# Altium PCB LNA.PcbDoc (part 1 of 2)
Units mm, origin at the board's own origin, x right, y up, seen from the top; angles counter-clockwise.
Board outline 50 x 50 mm, 4 copper layers (Top Layer, Layer 2, Layer 3, Bottom Layer), stack 1.513 mm thick; 84 components, 40 nets, 185 pads, 185 vias.
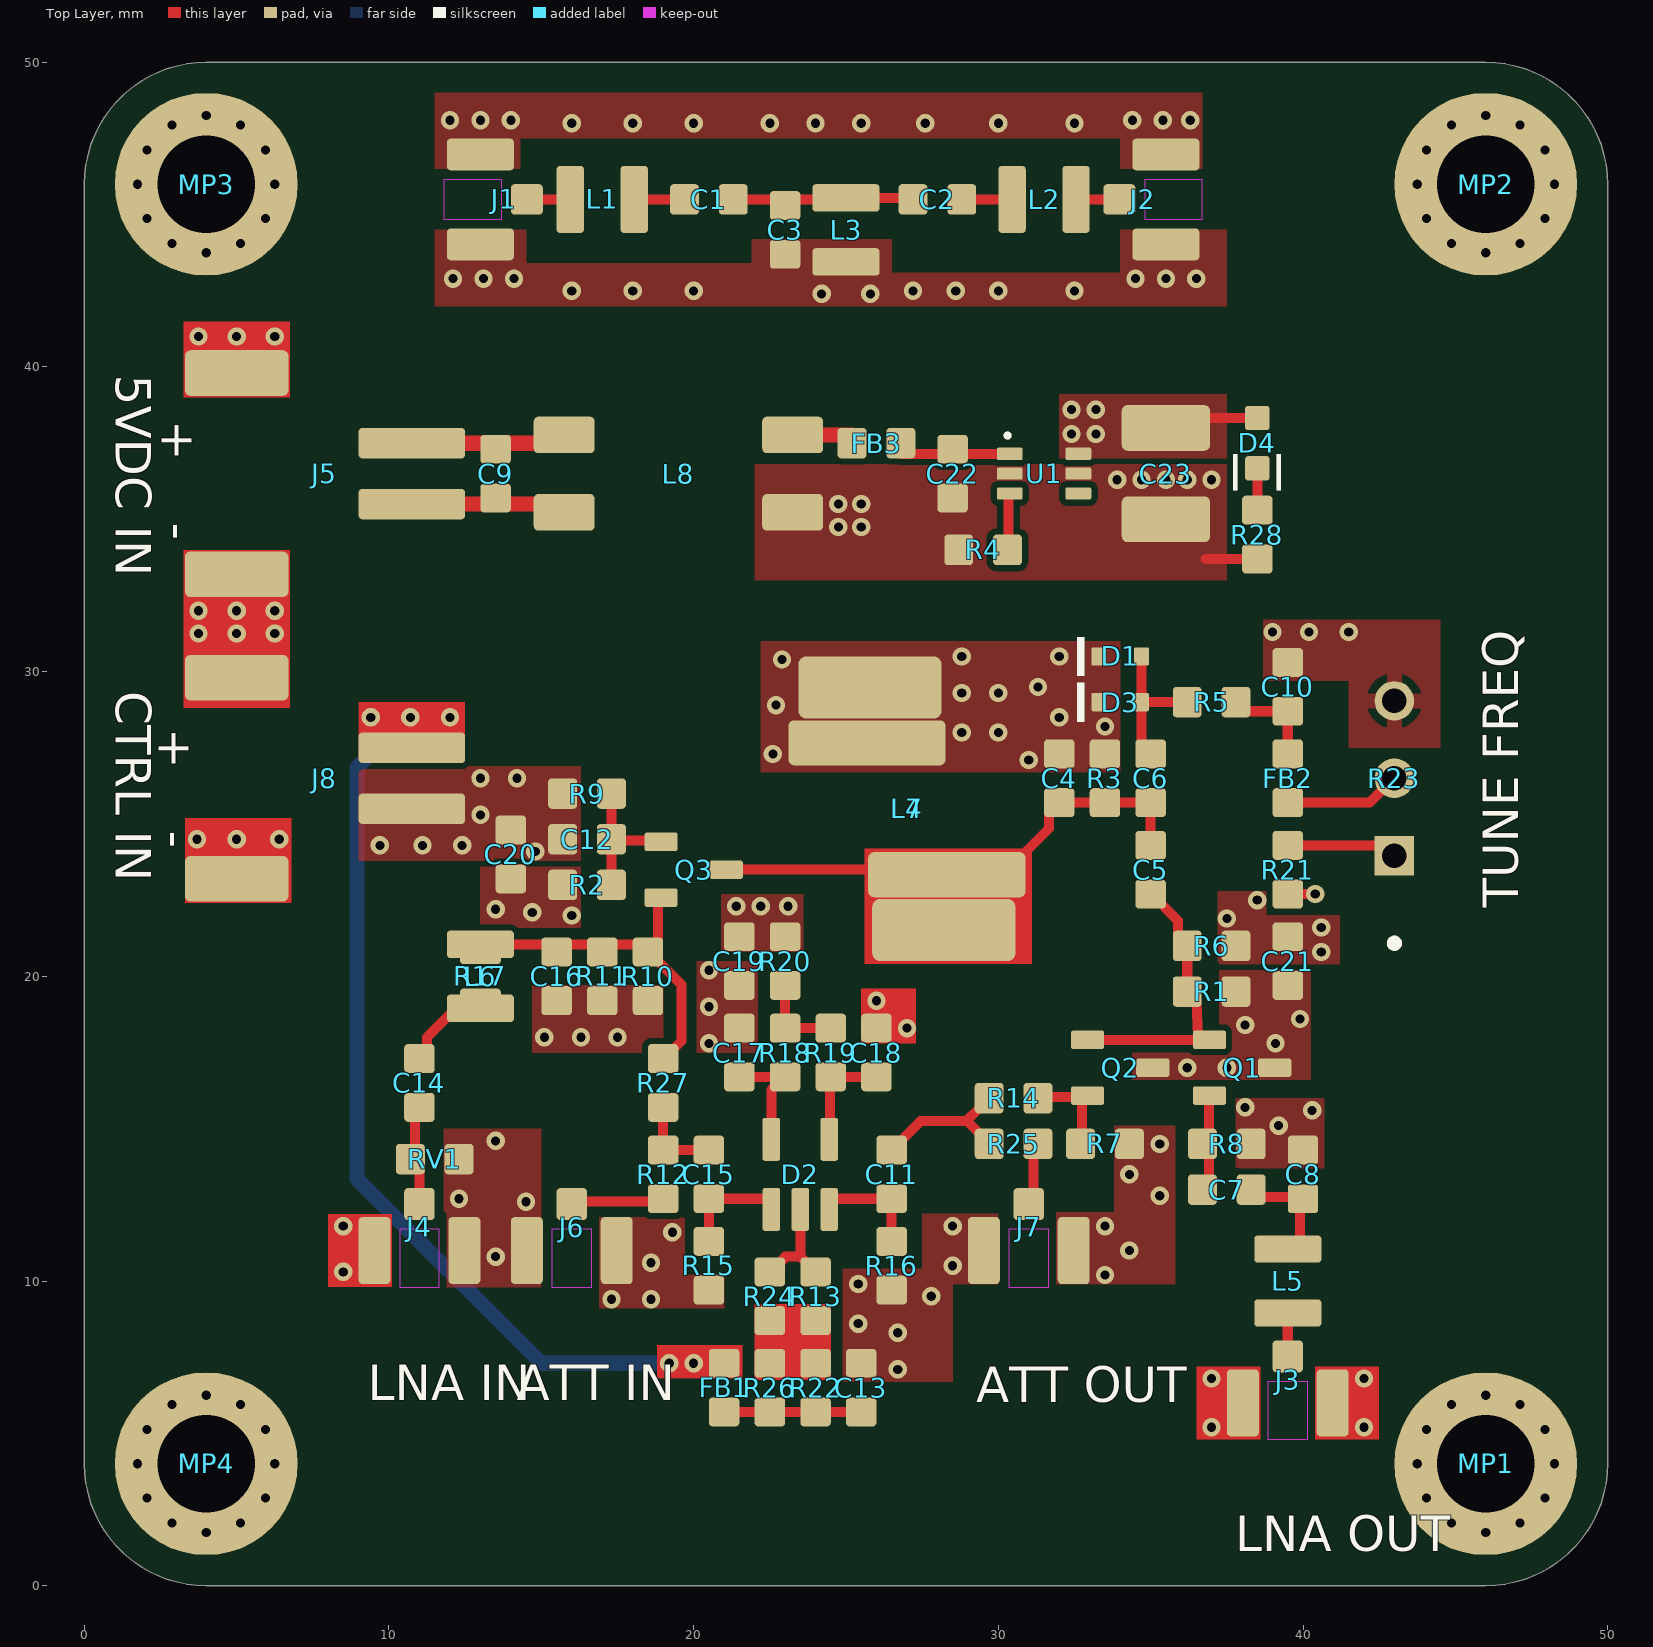
[diagram p0: Top Layer view]
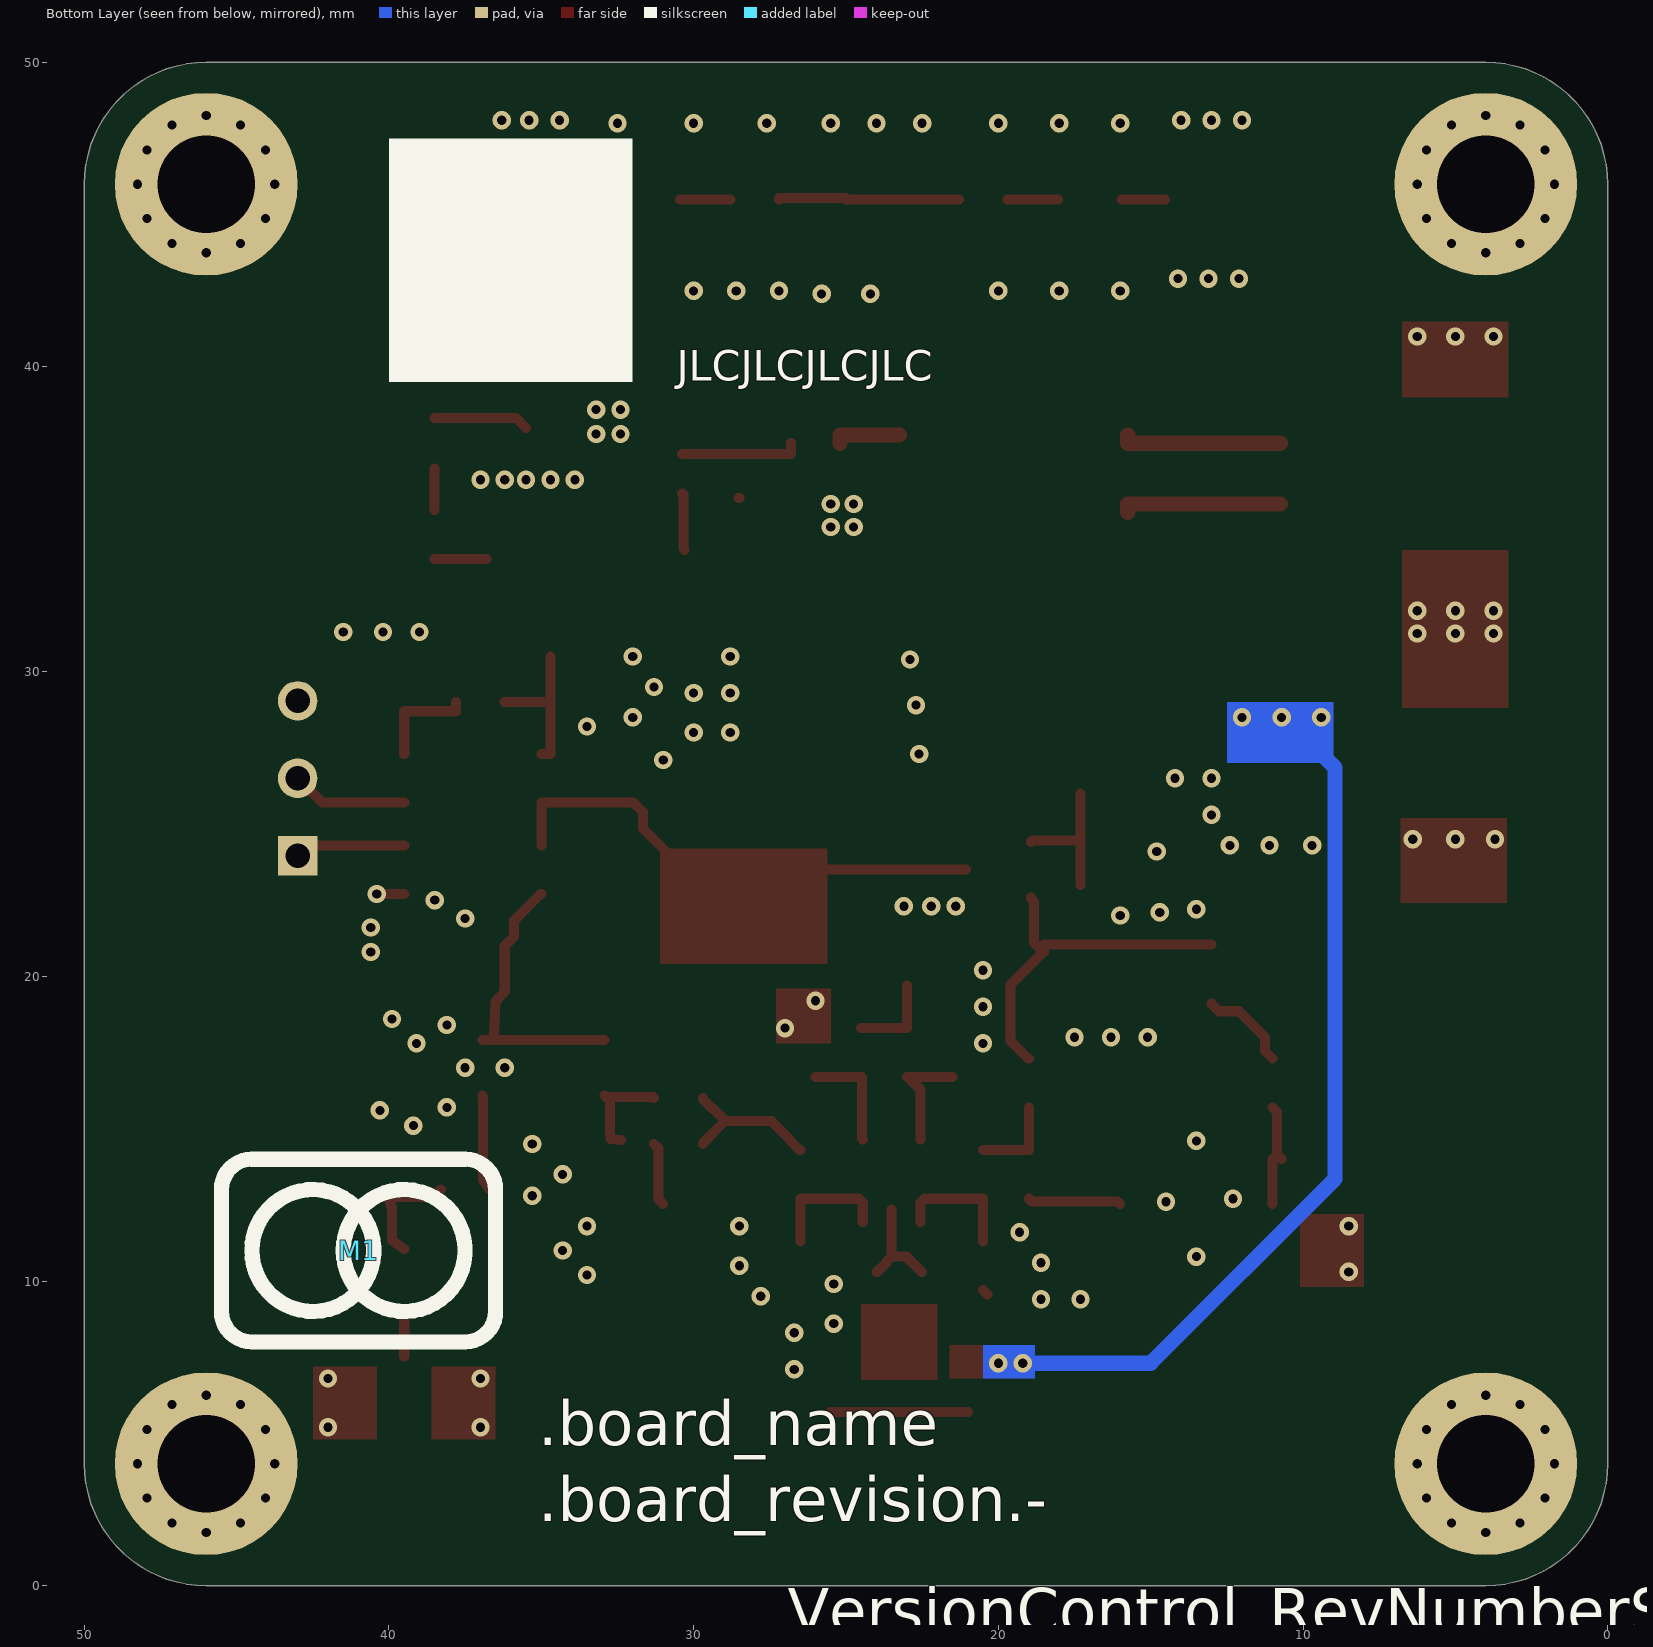
[diagram p1: Bottom Layer view, seen from below]
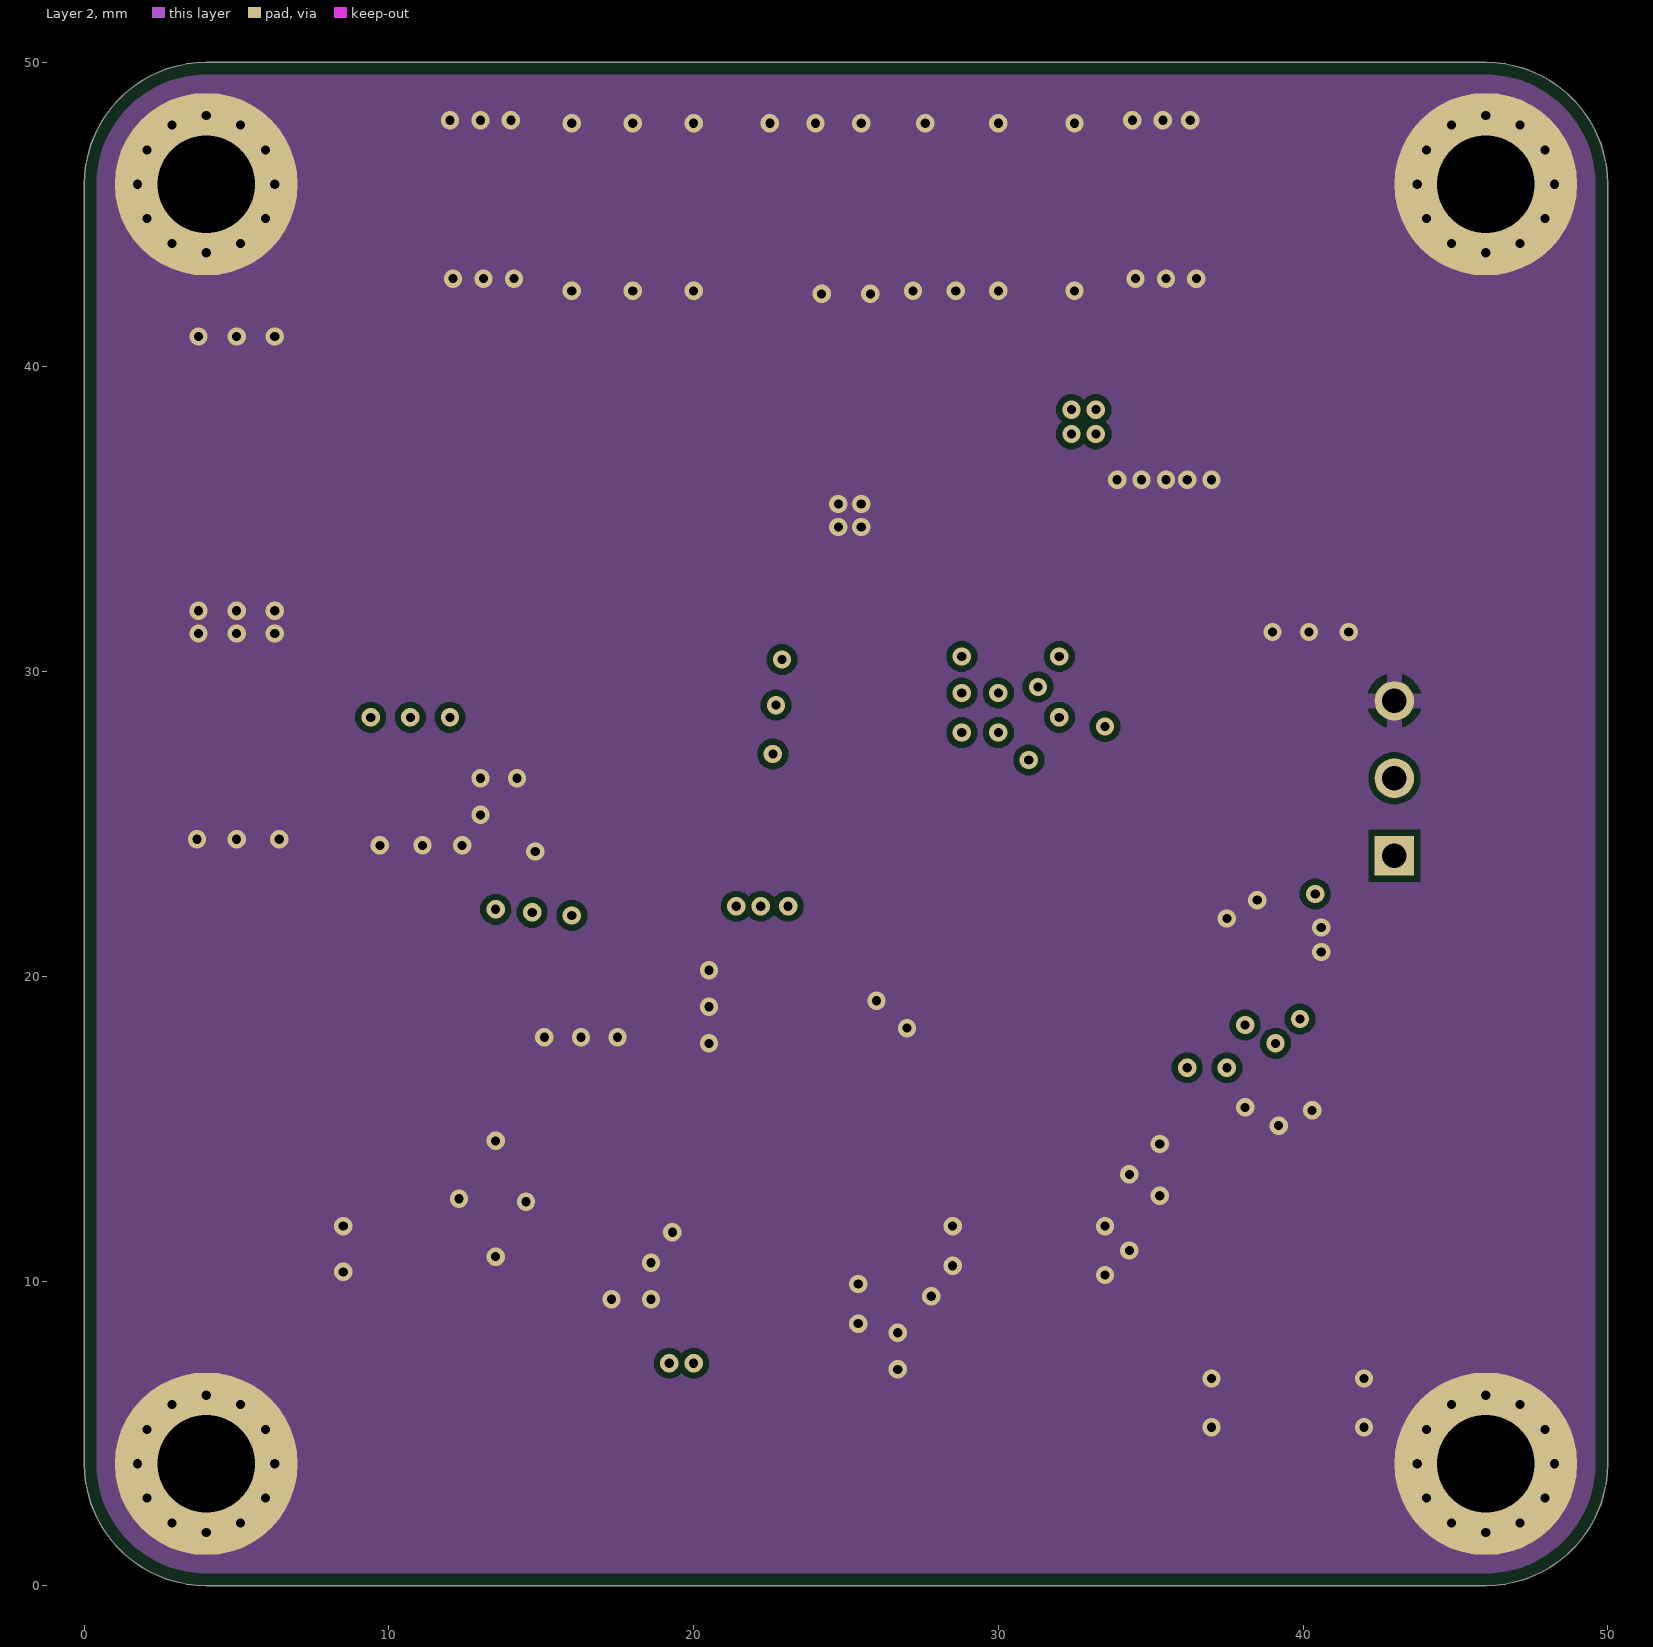
[diagram p2: Layer 2]
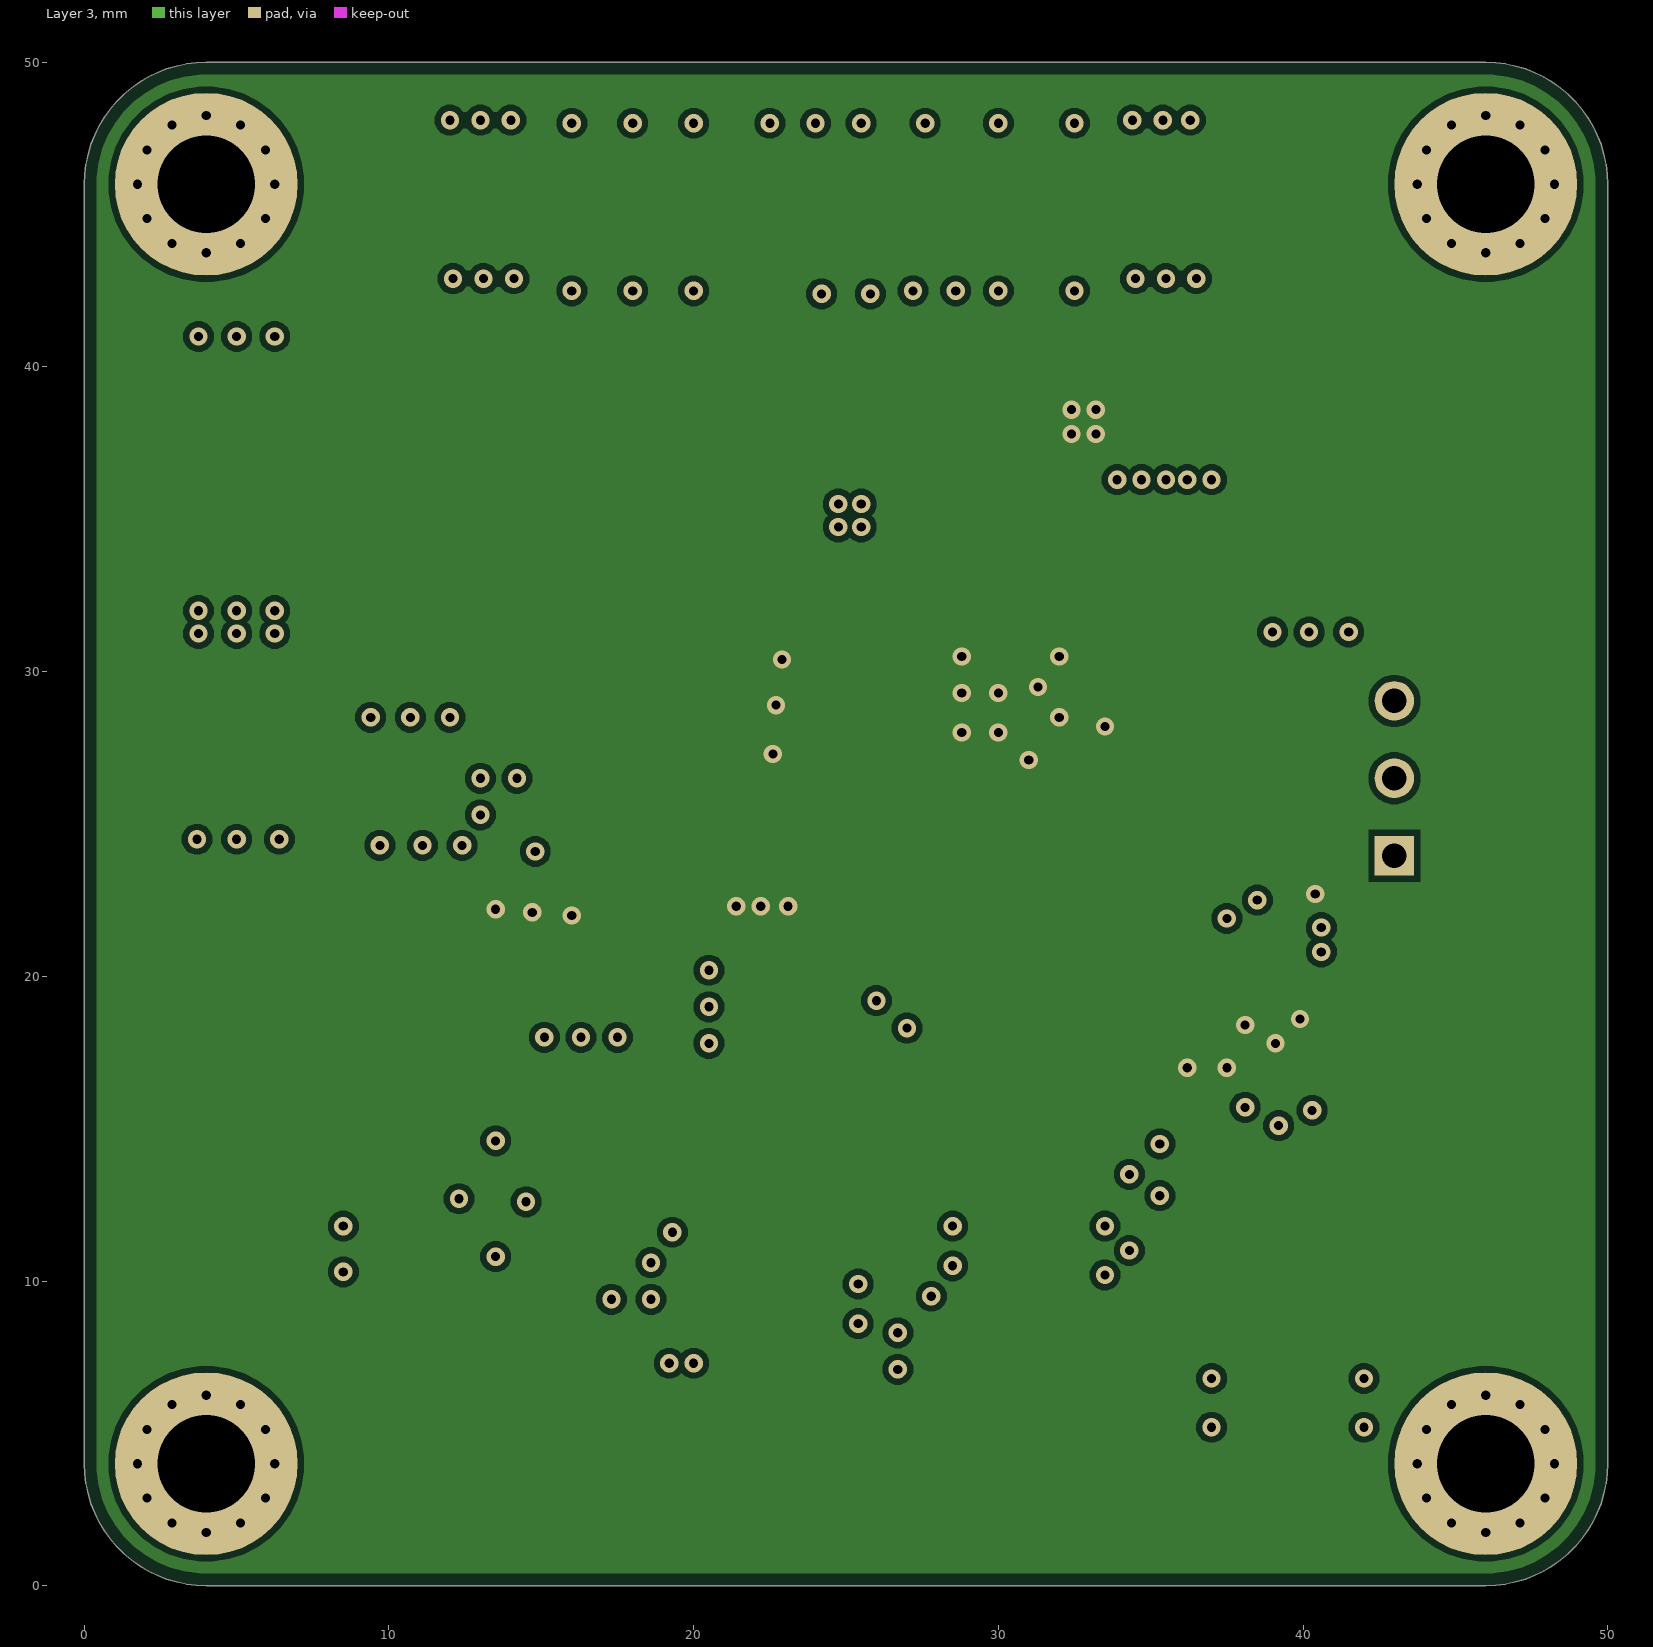
[diagram p3: Layer 3]
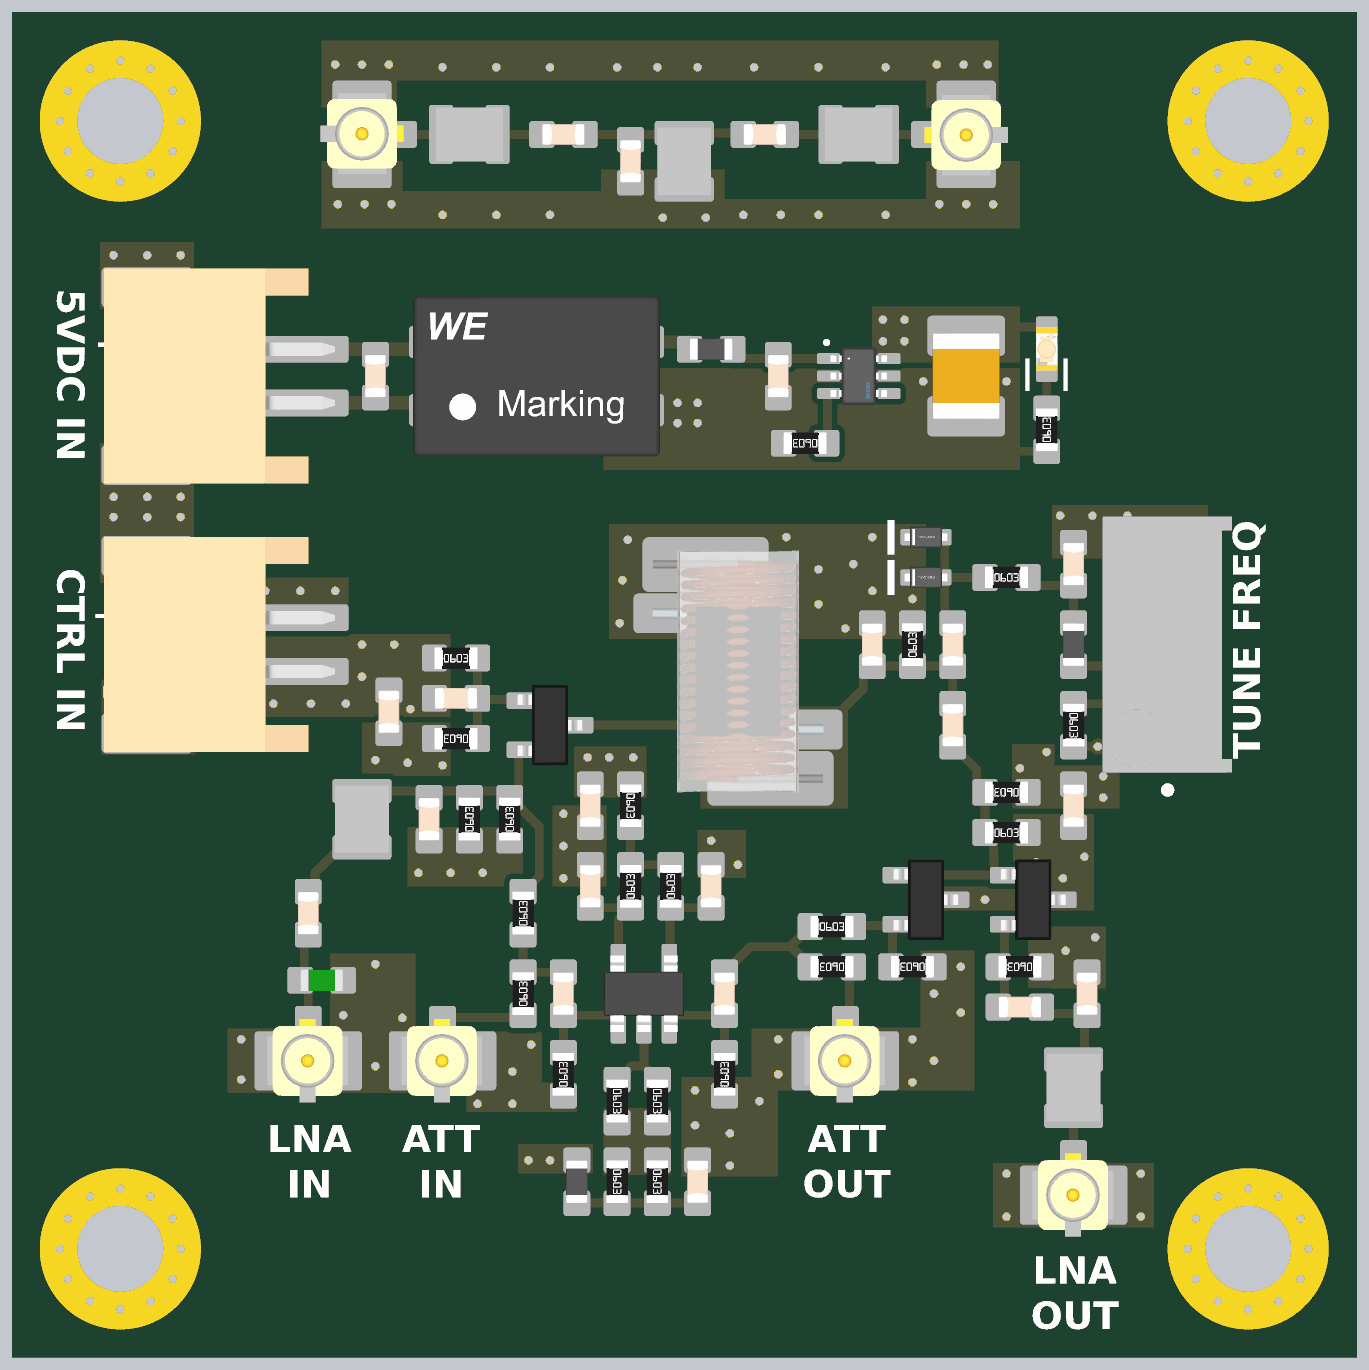
[diagram p4: 3D render of the assembled board from above, using the file's embedded part models]

## Layer stack, top to bottom
Top Solder: solder mask 0.0254, SM-001, Dk 4
Top Layer: signal copper 0.035
Dielectric 2: prepreg 0.2083, PP-022, Dk 4.5
Layer 2: signal copper 0.018
Dielectric 3: core 0.9906, Core-042, Dk 4.6
Layer 3: signal copper 0.018
Dielectric 5: prepreg 0.2083, PP-022, Dk 4.5
Bottom Layer: signal copper 0.035
Bottom Solder: solder mask 0.0254, SM-001, Dk 4

## Board outline
4,0 cw(c4,4) 0,4 0,46 cw(c4,46) 4,50 46,50 cw(c46,46) 50,46 50,4 cw(c46,4) 46,0

## Design rules (kind name [scope] priority, off if disabled: settings)
BoardOutlineClearance [IsElectrical or IsPoly] p1: gap=0.4 ignorepadtopadclearanceinfootprint=FALSE
Clearance Clearance_SelectiveSoldering [ispad and IsThruPin and not InComponentClass('NoSelectiveSoldering') vs ispad and IsSMTPin] p1 off: gap=4 ignorepadtopadclearanceinfootprint=TRUE // excludes smt studs
Clearance Clearance_NTPH_to_Track [IsTrack vs IsPad and IsThruPin and not PadIsPlated] p2: gap=0.254 ignorepadtopadclearanceinfootprint=TRUE
Clearance Clearance_TH_Pad_to_TH_Pad [IsPad and IsThruPin vs IsPad and IsThruPin] p3: gap=0.5 ignorepadtopadclearanceinfootprint=TRUE
Clearance Clearance_SMT_Pad_to_SMT_Pad [IsPad and IsSMTPin vs IsPad and IsSMTPin] p4: gap=0 ignorepadtopadclearanceinfootprint=TRUE
Clearance Clearance_No_Via_in_Pad [IsPad and not InPadClass('Via_in_pad_allowed') vs (IsVia AND not HasFootprint('PTH-M3D6.5_VIA-RING'))] p5: gap=0.1 ignorepadtopadclearanceinfootprint=TRUE
Clearance Clearance_Others [All] p6: gap=0.2 ignorepadtopadclearanceinfootprint=FALSE except(0.127: SMDPad-SMDPad)
ComponentClearance OverlappingComponents [InComponentClass('Overlap') vs InComponentClass('Overlap')] p1: gap=-10 collisioncheckmode=3 verticalgap=0 showdistances=TRUE donotcheckwithout3dbody=TRUE
ComponentClearance [All] p2: gap=0.2 collisioncheckmode=3 verticalgap=0.254 showdistances=FALSE
DiffPairsRouting HDMI [InDifferentialPairClass('HDMI')] p1: maxlimit=0.254 minlimit=0.2 mostfreqgap=0.254 toplayer_maxgap=0.2 toplayer_prefgap=0.2 toplayer_minwidth=0.207 toplayer_maxwidth=0.207 toplayer_prefwidth=0.207 midlayer1_minwidth=0.381 midlayer1_maxwidth=0.381 midlayer1_prefwidth=0.381 midlayer2_minwidth=0.381 midlayer2_maxwidth=0.381 midlayer2_prefwidth=0.381 bottomlayer_maxgap=0.2 bottomlayer_prefgap=0.2 bottomlayer_minwidth=0.207 bottomlayer_maxwidth=0.207 bottomlayer_prefwidth=0.207 impedanceprofiledriven=TRUE maxuncoupledlength=12.7
DiffPairsRouting ETH [InDifferentialPairClass('ETH')] p2: maxlimit=0.254 minlimit=0.2 mostfreqgap=0.254 toplayer_maxgap=0.2 toplayer_prefgap=0.2 toplayer_minwidth=0.207 toplayer_maxwidth=0.207 toplayer_prefwidth=0.207 midlayer1_minwidth=0.381 midlayer1_maxwidth=0.381 midlayer1_prefwidth=0.381 midlayer2_minwidth=0.381 midlayer2_maxwidth=0.381 midlayer2_prefwidth=0.381 bottomlayer_maxgap=0.2 bottomlayer_prefgap=0.2 bottomlayer_minwidth=0.207 bottomlayer_maxwidth=0.207 bottomlayer_prefwidth=0.207 impedanceprofiledriven=TRUE maxuncoupledlength=12.7
DiffPairsRouting USB [InDifferentialPairClass('USB')] p3: maxlimit=0.2 minlimit=0.2 mostfreqgap=0.2 toplayer_minwidth=0.272 toplayer_maxwidth=0.272 toplayer_prefwidth=0.272 midlayer1_minwidth=0.381 midlayer1_maxwidth=0.381 midlayer1_prefwidth=0.381 midlayer2_minwidth=0.381 midlayer2_maxwidth=0.381 midlayer2_prefwidth=0.381 bottomlayer_minwidth=0.272 bottomlayer_maxwidth=0.272 bottomlayer_prefwidth=0.272 impedanceprofiledriven=TRUE maxuncoupledlength=12.7
HoleSize NPTH_HoleSize [IsPad And not PadIsPlated] p1: absolutevalues=TRUE maxlimit=3.7 minlimit=0.2 maxpercent=80.000 minpercent=20.000
HoleSize Pad_HoleSize [IsPad] p2: absolutevalues=TRUE maxlimit=3.2 minlimit=0.3 maxpercent=80.000 minpercent=20.000
HoleSize Via_HoleSize [IsVia] p3: absolutevalues=TRUE maxlimit=6.3 minlimit=0.2 maxpercent=80.000 minpercent=20.000
HoleToHoleClearance [All] p1: gap=0.254 allowstackedmicrovias=FALSE
MatchedLengths InterPair_skew_HDMI [InDifferentialPairClass('HDMI')] p1: tolerance=1 checknetsindiffpair=FALSE checkdiffpairvsdiffpair=TRUE checkxsignals=TRUE checkothers=TRUE
MatchedLengths IntraPair_skew_all_DiffPairs [InDifferentialPairClass('All Differential Pairs')] p2: tolerance=0.15 checknetsindiffpair=TRUE checkdiffpairvsdiffpair=FALSE checkxsignals=FALSE checkothers=FALSE
MinimumAnnularRing [All] p1: minimumring=0.13
MinimumSolderMaskSliver [All] p1: minsoldermaskwidth=0.15
PolygonConnect PolygonConnect_NonSoldering [All vs (HasFootprint('PTH-M3D6.5_VIA-RING') OR HasFootprint('TP_1.5mm_0.3mmHole'))] p1: connectstyle=Direct reliefconductorwidth=0.254 reliefentries=4 polygonreliefangle="90 Angle" airgapwidth=0.254
PolygonConnect [All] p2: thpad.connectstyle=Relief thpad.reliefconductorwidth=0.5 thpad.reliefentries=4 thpad.polygonreliefangle="90 Angle" thpad.airgapwidth=0.254 smdpad.connectstyle=Direct smdpad.reliefconductorwidth=0.5 smdpad.reliefentries=4 smdpad.polygonreliefangle="90 Angle" smdpad.airgapwidth=0.254 via.connectstyle=Direct via.reliefconductorwidth=0.5 via.reliefentries=4 via.polygonreliefangle="90 Angle" via.airgapwidth=0.254
RoutingVias [All] p1: holewidth=0.3 width=0.6 viastyle="Through Hole" minholewidth=0.3 minwidth=0.6 maxholewidth=0.3 maxwidth=0.6
SilkToSolderMaskClearance [IsPad] p1: minsilkscreentomaskgap=0.2 clearancetoexposedcopper=TRUE
SolderMaskExpansion SolderMaskExpansion_Via [IsVia] p1: expansion=0.102 istentingtop=TRUE
SolderMaskExpansion SolderMaskExpansion_notVia [not IsVia] p2: expansion=0.05 istentingtop=FALSE
SupplyNets "Schematic Supply Nets" [InNet('+5V')] p1: voltage=0.000
SupplyNets "Schematic Supply Nets_2" [InNet('GND')] p2: voltage=0.000
Width S50_Width [InNetClass('S50')] p1: maxlimit=0.338 minlimit=0.133 preferedwidth=0.338 toplayer_minwidth=0.338 bottomlayer_minwidth=0.338 impedanceprofiledriven=TRUE minimp=50.000000 maximp=50.000000 favimp=50.000000
Width Default_Width [All] p2: maxlimit=2.5 minlimit=0.2 preferedwidth=0.33
24 further rules are at their usual default settings.

## Classes and differential pairs
component class Overlap: L4 L6 L7 R17

## Components (designator, comment, footprint, x,y, rotation, side; value= is the part's Value field where it differs from the comment)
C1 "Capacitor 6.8pF +/-0.5pF 50V NP0 0603" 0603-C-N 20.5,45.5 r180 top value=6.8pF
C2 "Capacitor 6.8pF +/-0.5pF 50V NP0 0603" 0603-C-N 28,45.5 r180 top value=6.8pF
C3 "Cap Ceramic 180pF +/-5% 100V C0G 0603" 0603-C-N 23,44.5 r90 top value=180pF
C4 "Capacitor 33pF +/-5% 50V NP0 0603" 0603-C-N 32,26.5 r90 top value=33pF
C5 "Capacitor 10nF 50V NP0 0603" 0603-C-N 35,23.5 r270 top value=10nF
C6 "Capacitor 10nF 50V NP0 0603" 0603-C-N 35,26.5 r270 top value=10nF
C7 "Capacitor 10nF 50V NP0 0603" 0603-C-N 37.5,13 r0 top value=10nF
C8 "Capacitor 10pF +/-5% 50V NP0 0603" 0603-C-N 40,13.5 r90 top value=10pF
C9 "Capacitor 100nF +/-10% 50V X7R 0603" 0603-C-N 13.5,36.5 r90 top value=100nF
C10 "Capacitor 10nF 50V NP0 0603" 0603-C-N 39.5,29.5 r90 top value=10nF
C11 "Capacitor 10nF 50V NP0 0603" 0603-C-N 26.5,13.5 r270 top value=10nF
C12 "Capacitor 10nF 50V NP0 0603" 0603-C-N 16.5,24.5 r180 top value=10nF
C13 "Capacitor 10nF 50V NP0 0603" 0603-C-N 25.5,6.5 r270 top value=10nF
C14 "Capacitor 10nF 50V NP0 0603" 0603-C-N 11,16.5 r90 top value=10nF
C15 "Capacitor 10nF 50V NP0 0603" 0603-C-N 20.5,13.5 r90 top value=10nF
C16 "Capacitor 10pF +/-5% 50V NP0 0603" 0603-C-N 15.5,20 r90 top value=10pF
C17 "Capacitor 10nF 50V NP0 0603" 0603-C-N 21.5,17.5 r90 top value=10nF
C18 "Capacitor 10nF 50V NP0 0603" 0603-C-N 26,17.5 r270 top value=10nF
C19 "Capacitor 10nF 50V NP0 0603" 0603-C-N 21.5,20.5 r270 top value=10nF
C20 "Capacitor 10nF 50V NP0 0603" 0603-C-N 14,24 r90 top value=10nF
C21 "Capacitor 10nF 50V NP0 0603" 0603-C-N 39.5,20.5 r90 top value=10nF
C22 "Capacitor 100nF +/-10% 50V X7R 0603" 0603-C-N 28.5,36.5 r90 top value=100nF
C23 "Capacitor 10µF +/-10% 50V X7R 1210" WCAP-CSGP_1210_L3.2W2.5H2.5 35.5,36.5 r90 top value=10µF
D1 "SMV1220-079LF" FP-SOD523-MFG 34,30.5 r0 top value=SMV1220
D2 "SMP1307-027LF" SOT25-N 23.5,13.5 r90 top
D3 "SMV1220-079LF" FP-SOD523-MFG 34,29 r0 top value=SMV1220
D4 "150060GS84000" WL-SMCW_0603_150060xx8x000 38.5,37.5 r90 top
FB1 "742792662" 0603-FB-N 21,6.5 r270 top
FB2 "742792662" 0603-FB-N 39.5,26.5 r270 top
FB3 "742792662" 0603-FB-N 26,37.5 r180 top
J1 "U.FL-R-SMT(10)" HRS-U.FL-R-SMT_V 13,45.5 r90 top value=U.FL
J2 "U.FL-R-SMT(10)" HRS-U.FL-R-SMT_V 35.5,45.5 r270 top value=U.FL
J3 "U.FL-R-SMT(10)" HRS-U.FL-R-SMT_V 39.5,6 r180 top value=U.FL
J4 "U.FL-R-SMT(10)" HRS-U.FL-R-SMT_V 11,11 r180 top value=U.FL
J5 "620102131822" 620102131822 9,36.5 r270 top value=JST-PH
J6 "U.FL-R-SMT(10)" HRS-U.FL-R-SMT_V 16,11 r180 top value=U.FL
J7 "U.FL-R-SMT(10)" HRS-U.FL-R-SMT_V 31,11 r180 top value=U.FL
J8 "620102131822" 620102131822 9,26.5 r270 top value=JST-PH
L1 "744762239GA" WE-KI_1008 17,45.5 r0 top
L2 "744762239GA" WE-KI_1008 31.5,45.5 r0 top
L3 "744762115GA" WE-KI_1008 25,44.5 r90 top
L4 "744912147" WE-CAIR_4248 27,25.5 r90 top
L5 "744762227GA" WE-KI_1008 39.5,10 r270 top
L6 "744762210GA" WE-KI_1008 13,20 r90 top
L7 "744918222" WE-CAIR_5910 27,25.5 r90 top
L8 "744222" WE-SL2_L9.2W6H5 19.5,36.5 r0 top
M1 "Logo" LOGO_9x6mm 41,11 r0 bottom
MP1 "MountingHole" PTH-M3D6.5_VIA-RING 46,4 r0 top
MP2 "MountingHole" PTH-M3D6.5_VIA-RING 46,46 r0 top
MP3 "MountingHole" PTH-M3D6.5_VIA-RING 4,46 r0 top
MP4 "MountingHole" PTH-M3D6.5_VIA-RING 4,4 r0 top
Q1 "MMBT5179" SOT-23-3-N 38,17 r0 top
Q2 "MMBT5179" SOT-23-3-N 34,17 r0 top
Q3 "MMBT5179" SOT-23-3-N 20,23.5 r0 top
R1 "Resistor 22k +/-1% 50V 0603" 0603-R-N 37,19.5 r0 top value=22k
R2 "Resistor 39k +/-1% 0.1W 0603" 0603-R-N 16.5,23 r180 top value=39k
R3 "Resistor 2.7k +/-1% 0.1W 0603" 0603-R-N 33.5,26.5 r90 top value=2.7k
R4 "Jumper 0R <50 mOhm 1A 0603" 0603-R-N 29.5,34 r180 top value=0
R5 "Resistor 100k +/-1% 50V 0603" 0603-R-N 37,29 r0 top value=100k
R6 "Resistor 18k +/-1% 50V 0603" 0603-R-N 37,21 r180 top value=18k
R7 "Resistor 2.7k +/-1% 0.1W 0603" 0603-R-N 33.5,14.5 r180 top value=2.7k
R8 "Resistor 1k +/-1% 50V 0603" 0603-R-N 37.5,14.5 r180 top value=1k
R9 "Resistor 36k +/-1% 50V 0603" 0603-R-N 16.5,26 r0 top value=36k
R10 "Resistor 5.6k +/-1% 0.1W 0603" 0603-R-N 18.5,20 r90 top value=5.6k
R11 "Resistor 5.6k +/-1% 0.1W 0603" 0603-R-N 17,20 r90 top value=5.6k
R12 "Jumper 0R <50 mOhm 1A 0603" 0603-R-N 19,13.5 r90 top value=0
R13 "Resistor 1k +/-1% 50V 0603" 0603-R-N 24,9.5 r270 top value=1k
R14 "Resistor 270R +/-1% 50V 0603" 0603-R-N 30.5,16 r0 top value=270
R15 "Resistor 560R +/-1% 0.1W 0603" 0603-R-N 20.5,10.5 r90 top value=560
R16 "Resistor 560R +/-1% 0.1W 0603" 0603-R-N 26.5,10.5 r90 top value=560
R17 "Jumper 0R <50 mOhm 2A 0805" 0805-R-N 13,20 r90 top value=0
R18 "Resistor 1k +/-1% 50V 0603" 0603-R-N 23,17.5 r90 top value=1k
R19 "Resistor 1k +/-1% 50V 0603" 0603-R-N 24.5,17.5 r90 top value=1k
R20 "Resistor 560R +/-1% 0.1W 0603" 0603-R-N 23,20.5 r270 top value=560
R21 "Jumper 0R <50 mOhm 1A 0603" 0603-R-N 39.5,23.5 r270 top value=0
R22 "Resistor 1k +/-1% 50V 0603" 0603-R-N 24,6.5 r270 top value=1k
R23 "3296W-1-103LF" BOUR-3296W 43,26.5 r90 top value=10k
R24 "Resistor 1k +/-1% 50V 0603" 0603-R-N 22.5,9.5 r270 top value=1k
R25 "Jumper 0R <50 mOhm 1A 0603" 0603-R-N 30.5,14.5 r180 top value=0
R26 "Resistor 1k +/-1% 50V 0603" 0603-R-N 22.5,6.5 r270 top value=1k
R27 "Jumper 0R <50 mOhm 1A 0603" 0603-R-N 19,16.5 r90 top value=0
R28 "Resistor 5.6k +/-1% 0.1W 0603" 0603-R-N 38.5,34.5 r90 top value=5.6k
RV1 "8231606A" 0603-VAR-N 11.5,14 r180 top
U1 "LM66100DCKT" SOT-363-N 31.5,36.5 r0 top

## Footprints (in the part's own frame and the unit in brackets; to place one, negate y for a bottom-side part, rotate by r counter-clockwise, add the part's x,y. Pads: shape width x height; smd on the part's side, far side on the other; paste and mask are expansions set on the pad)
0603-C-N [mm]
  rrect25% 0.95x1 smd: 1(-0.8,0) 2(0.8,0)
  body extent -0.8,-0.4 0.8,0.4, height 0.81
0603-FB-N [mm]
  rrect25% 0.95x1 smd: 1(-0.8,0) 2(0.8,0)
  body extent -0.8,-0.4 0.8,0.4, height 0.8
0603-R-N [mm]
  rrect25% 0.95x1 smd: 1(-0.8,0) 2(0.8,0)
  body extent -0.8,-0.4 0.8,0.4, height 0.47
0603-VAR-N [mm]
  rrect25% 0.95x1 smd: 1(-0.8,0) 2(0.8,0)
  body extent -0.8,-0.4 0.8,0.4, height 0.53
0805-R-N [mm] "Chip Resistor, 2-Leads, Body 2.1x1.35mm, IPC Medium Density"
  rrect25% 1x1.35 smd: 1(-0.9,0) 2(0.9,0)
  body extent -1.05,-0.68 1.05,0.67, height 0.6
620102131822 [mm] "2.00mm SMT Male Horizontal Shrouded Header, 2p"
  rrect25% 1x3.5 smd: 1(-1,1.75) 2(1,1.75)
  rrect25% 1.5x3.4 smd: MP1(-3.3,-4) MP2(3.3,-4)
  body extent -4,-5.6 4,3, height 5.57
BOUR-3296W [mm] "THD, 3-Leads, Body 9.53x4.83mm, Pitch 2.54mm"
  rect 1.3x1.3 hole 0.8: 1(-2.54,0)
  round 1.3 hole 0.8: 2(0,0) 3(2.54,0)
  silkscreen extent -5.54,-0.13 -5.29,0.12, body extent -4.76,-2.41 4.76,2.42, height 11.55
FP-SOD523-MFG [mm]
  rrect25% 0.5x0.6 smd: 1(-0.7,0) 2(0.7,0)
  silkscreen extent -1.43,-0.65 -1.17,0.65, body extent -1.07,-0.6 1.07,0.6, height 0.25
HRS-U.FL-R-SMT_V [mm] "SMD, 3-Leads, Body 2.6x2.6mm"
  rrect25% 1.05x2.2 smd: 1(-1.475,0) 2(1.475,0)
  rrect25% 1x1.05 smd: 3(0,-1.525)
  Top Layer keep-out region: -0.65,-0.7 0.65,-0.7 0.65,1.2 -0.65,1.2
  body extent -1.48,-1.55 1.52,1.55, height 1.25
LOGO_9x6mm [mm]
  silkscreen extent -4.5,-3 4.5,3
PTH-M3D6.5_VIA-RING [mm]
  round 6 hole 3.2: 1(0,0)
SOT25-N [mm] "SOT-23-5 IPC Nominal, EIAJ SC-74A, SOT753, TSOP5"
  rrect25% 1.407x0.576 smd: 1(-1.151,0.95) 2(-1.151,0) 3(-1.151,-0.95) 4(1.151,-0.95) 5(1.151,0.95)
  body extent -1.42,-1.5 1.42,1.5, height 1.2
SOT-23-3-N [mm] "SOT-23, 3-Leads, Body 3x1.4mm, Pitch 0.95mm, IPC Medium Density"
  rrect25% 1.09x0.61 smd: 1(-1.07,0.915) 2(-1.07,-0.915) 3(1.07,0)
  body extent -1.22,-1.5 1.22,1.5, height 1
SOT-363-N [mm] "SOT363, TSSOP-6, SC70-6, SC-88  / IPC Medium density (Nominal size), pitch 0.65mm"
  rrect25% 0.85x0.4 smd: 1(-1.125,0.65) 2(-1.125,0) 3(-1.125,-0.65) 4(1.125,-0.65) 5(1.125,0) 6(1.125,0.65)
  silkscreen extent -1.21,1.24 -1.19,1.26, body extent -1.71,-1.33 1.71,1.33, height 0.25
WCAP-CSGP_1210_L3.2W2.5H2.5 [mm] "Ceramic Capacitors, body 3.2x2.5mm"
  rrect25% 1.5x2.9 smd: 1(-1.5,0) 2(1.5,0)
  body extent -1.6,-1.25 1.6,1.25, height 2.5
WE-CAIR_4248 [mm] "SMD Inductor, 2-Leads, Body 3.81x4.83mm"
  rrect25% 1.48x5.16 smd: 1(-2.165,-1.31) 2(2.165,1.31)
  body extent -2.41,-3.18 2.41,3.18, height 4.18
WE-CAIR_5910 [mm] "SMD Inductor, 2-Leads, Body 10.55x6.35mm"
  rrect25% 2.04x4.7 smd: 1(-3.98,-1.21) 2(3.98,1.21)
  body extent -4.5,-3.17 4.5,3.17, height 4.35
WE-KI_1008 [mm] "SMD Wire Wound Ceramic Inductor, body 2.50x2.00mm"
  rrect25% 0.9x2.2 smd: 1(-1.05,0) 2(1.05,0)
  body extent -1.25,-1 1.25,1, height 1.12
WE-SL2_L9.2W6H5 [mm] "SMD Inductor, 4-Leads, Body 9.2x6mm"
  rrect25% 2x1.2 smd: 1(-3.75,1.27) 2(-3.75,-1.27) 3(3.75,-1.27) 4(3.75,1.27)
  body extent -4.6,-3 4.6,3, height 5
WL-SMCW_0603_150060xx8x000 [mm] "SMD Mono-color Chip LED, body 1.6x0.8mm"
  rrect25% 0.8x0.8 smd: 1(-0.825,0) 2(0.825,0)
  silkscreen extent -1.55,-0.78 -0.35,0.8, body extent -0.8,-0.4 0.8,0.4, height 0.95

## Part data
C1 C2: library part CMP-072-000121-14, "WCAP-CSGP Multilayer Ceramic Chip Capacitor, General Purpose, size 0603, NP0, 6.8pF, 50VDC", Capacitor Type=MLCC, Case/Package=0603, Dielectric=NP0, Insulation Resistance=10GO, Max Operating Temperature=125°C, Min Operating Temperature=-55°C, Tolerance=0.5pF, Voltage Rating=50V, ComponentLink1Description="Website Link", ComponentLink1URL=https://www.we-online.com/redexpert/article/885012006050?ad, ComponentLink2Description="Datasheet Link", ComponentLink2URL=https://www.we-online.com/redexpert/spec/885012006050?ad, Design Item ID=885012006050, Height=0.8mm, Length=1.6mm, Match Code=WCAP-CSGP, Mounting Technology=SMT, Packaging="Tape and Reel", Pins=2, Q Factor=536, Source=WCAP-CSGP.SchLib, Technical Reference=NP006036R8D050DFCT10000, Usage="General Purpose", Width=0.8mm
C3: library part CMP-001-00136-4, "Cap Ceramic 180pF 100V C0G 5% SMD 0603 125°C Paper T/R", Case Code (Imperial)=0603, Case Code (Metric)=1608, Dielectric=C0G, JLCPCB Part #=C107041, Max Operating Temperature=125°C, Min Operating Temperature=-55°C, Tolerance=5%, Voltage Rating=100V, Case/Package=0603, Length=0.063inch, Mounting Technology="Surface Mount", Packaging="Tape and Reel", RoHS Compliant=Yes, Series=CC, Termination=SMD/SMT, Thickness=0.035inch, Voltage Rating (DC)=100V, Weight=7.1E-05oz, Width=0.031inch
C4: library part CMP-072-000125-14, "WCAP-CSGP Multilayer Ceramic Chip Capacitor, General Purpose, size 0603, NP0, 33pF, 50VDC", Capacitor Type=MLCC, Case/Package=0603, Dielectric=NP0, Insulation Resistance=10GO, Max Operating Temperature=125°C, Min Operating Temperature=-55°C, Tolerance=5%, Voltage Rating=50V, ComponentLink1Description="Website Link", ComponentLink1URL=https://www.we-online.com/redexpert/article/885012006054?ad, ComponentLink2Description="Datasheet Link", ComponentLink2URL=https://www.we-online.com/redexpert/spec/885012006054?ad, Design Item ID=885012006054, Height=0.8mm, Length=1.6mm, Match Code=WCAP-CSGP, Mounting Technology=SMT, Packaging="Tape and Reel", Pins=2, Q Factor=1000, Source=WCAP-CSGP.SchLib, Technical Reference=NP00603330J050DFCT10000, Usage="General Purpose", Width=0.8mm
C5 C6 C7 C10 C11 C12 C13 C14 C15 C17 C18 C19 C20 C21: library part CMP-001-00137-6, "Multilayer Ceramic Capacitor, Grm Series, 0.01 F, 5%, C0g / Np0, 50 V, 0603 [1608 Metric]", Case Code (Imperial)=0603, Case Code (Metric)=1608, Dielectric=C0G, JLCPCB Part #=C85973, Max Operating Temperature=125°C, Min Operating Temperature=-55°C, Package Quantity=4000, Temperature Coefficient=30ppm/°C, Tolerance=5%, Voltage=50V, Case/Package=0603, Depth=0.8mm, FLIR Part #=YCAM10N-7, Height=0.8mm, Lead Free="Lead Free", Lead Pitch=0.5mm, Length=1.6mm, Material=Ceramic, Mounting Technology="Surface Mount", Packaging="Cut Tape", Reach SVHC Compliant=No, RoHS Compliant=Yes, Series=GRM, Termination=SMD/SMT, Thickness=0.035inch, Voltage Rating=50V, Voltage Rating (DC)=50V, Width=0.8mm
C8 C16: library part CMP-072-000122-18, "WCAP-CSGP Multilayer Ceramic Chip Capacitor, General Purpose, size 0603, NP0, 10pF, 50VDC", Capacitor Type=MLCC, Case/Package=0603, Dielectric=NP0, Insulation Resistance=10GO, JLCPCB Part #=C106245, Max Operating Temperature=125°C, Min Operating Temperature=-55°C, Tolerance=5%, Voltage Rating=50V, ComponentLink1Description="Website Link", ComponentLink1URL=https://www.we-online.com/redexpert/article/885012006051?ad, ComponentLink2Description="Datasheet Link", ComponentLink2URL=https://www.we-online.com/redexpert/spec/885012006051?ad, Design Item ID=885012006051, Height=0.8mm, Length=1.6mm, Match Code=WCAP-CSGP, Mounting Technology=SMT, Packaging="Tape and Reel", Page Part #=CCQJ100, Pins=2, Q Factor=600, Source=WCAP-CSGP.SchLib, Technical Reference=NP00603100J050DFCT10000, Usage="General Purpose", Width=0.8mm
C9 C22: library part CMP-072-000619-16, "WCAP-CSGP Multilayer Ceramic Chip Capacitor, General Purpose, size 0603, X7R, 100nF, 50VDC", Capacitor Type=MLCC, Case/Package=0603, Dielectric=X7R, Insulation Resistance=5GO, JLCPCB Part #=C14663, Max Operating Temperature=125°C, Min Operating Temperature=-55°C, Tolerance=10%, Voltage Rating=50V, ComponentLink1Description="Website Link", ComponentLink1URL=https://www.we-online.com/redexpert/article/885012206095?ad, ComponentLink2Description="Datasheet Link", ComponentLink2URL=https://www.we-online.com/redexpert/spec/885012206095?ad, Design Item ID=885012206095, Dissipation Factor=3%, Height=0.8mm, Length=1.6mm, Match Code=WCAP-CSGP, Mounting Technology=SMT, Packaging="Tape and Reel", Pins=2, Source=WCAP-CSGP.SchLib, Technical Reference=X7R0603104K050DFCT10000, Usage="General Purpose", Width=0.8mm
C23: library part CMP-072-000922-16, "WCAP-CSGP Multilayer Ceramic Chip Capacitor, General Purpose, size 1210, X7R, 10µF, 50VDC", Capacitor Type=MLCC, Case/Package=1210, Dielectric=X7R, Insulation Resistance=0.01GO, JLCPCB Part #=C77102, Max Operating Temperature=125°C, Min Operating Temperature=-55°C, Tolerance=10%, Voltage Rating=50V, ComponentLink1Description="Website Link", ComponentLink1URL=https://www.we-online.com/redexpert/article/885012209073?ad, ComponentLink2Description="Datasheet Link", ComponentLink2URL=https://www.we-online.com/redexpert/spec/885012209073?ad, Design Item ID=885012209073, Dissipation Factor=10%, Height=2.5mm, Length=3.2mm, Match Code=WCAP-CSGP, Mounting Technology=SMT, Packaging="Tape and Reel", Pins=2, Source=WCAP-CSGP.SchLib, Technical Reference=X7R1210106K050DFCT10000, Usage="General Purpose", Width=2.5mm
D1 D3: library part CMP-004-00057-3, "Diode, Varactor, SC79 N-Type", Case/Package=SC, Max Operating Temperature=125°C, Min Operating Temperature=-55°C, Mounting Technology="Surface Mount", Packaging="Cut Tape", RoHS Compliant=Yes, Series=-
D2: library part CMP-004-00058-1, "Dio Sw 0.85V 200V 10MA SOT5", Case/Package=SOT-5, Forward Current=10mA, Forward Voltage=850mV, Max Operating Temperature=150°C, Max Power Dissipation=250mW, Min Operating Temperature=-65°C, Package Quantity=3000, Reverse Voltage=200V, Height=1.63mm, Mounting Technology="Surface Mount", Packaging="Tape and Reel", Pins=5, Power Dissipation=250mW, Radiation Hardening=No, Reverse Voltage (DC)=200V, RoHS Compliant=Yes, Series=-, Termination=SMD/SMT, Weight=0.000557oz
D4: library part CMP-002-001076-14, "WL-SMCW Mono-color Chip LED Waterclear, size 0603, Green, 3.3V, 40°", Case/Size Code=0603, Emitting Color=Green, Forward Voltage=3.3V, JLCPCB Part #=C7429914, Manufacturer="Wurth Elektronik", Operating Temperature Max=85°C, Operating Temperature Min=-40°C, Category="Signal LEDs", Chip Technology=InGaN, Component Type=Standard, ComponentLink1Description="Website Link", ComponentLink1URL=https://www.we-online.com/redexpert/article/150060GS84000?ad, ComponentLink2Description="Datasheet Link", ComponentLink2URL=https://www.we-online.com/redexpert/spec/150060GS84000?ad, Design Item ID=150060GS84000, Dominant Wavelength=525nm, Height=0.95mm, Length=1.6mm, Luminous Intensity=3000mcd, Manufacturer Part Number=150060GS84000, Match Code=WL-SMCW, Mount="Surface Mount", Packaging="Tape and Reel", Peak Wavelength=520nm, Pin Count=2, Source=WL-SMCW.SchLib, Viewing Angle=40°, Width=0.8mm
FB1 FB2 FB3: library part CMP-066-000126-8, "WE-CBF SMT EMI Suppression Ferrite Bead, size 0603, 1000O, 0.83A", Case/Size Code=0603, DC Resistance Max=0.3O, JLCPCB Part #=C180490, Manufacturer="Wurth Elektronik", Operating Temperature Max=125°C, Operating Temperature Min=-55°C, Rated Current=0.6A, Category="Ferrites for PCB Assembly", Component Type=Standard, ComponentLink1Description="Website Link", ComponentLink1URL=https://www.we-online.com/redexpert/article/742792662?ad, ComponentLink2Description="Datasheet Link", ComponentLink2URL=https://www.we-online.com/redexpert/spec/742792662?ad, Design Item ID=742792662, Height=0.8mm, Impedance @100MHz=1000O, Impedance Max=1050O, Impedance Max Test Condition=120MHz, Length=1.6mm, Manufacturer Part Number=742792662, Match Code=WE-CBF, Mount="Surface Mount", Packaging="Tape and Reel", Page Part #=FILTER279, Pin Count=2, Type="Wide Band", Width=0.8mm
J1 J2 J3 J4 J6 J7: library part CMP-002-00035-12, "Ultra Small Surface Mount Coaxial Connector, 50 Ohm, -40 to 90 degC, 3-Pin SMD, RoHS, Tape and Reel", Case/Package=U.FL-R-SMT, JLCPCB Part #=C88373, Manufacturer="Hirose Electric", Max Operating Temperature=90°C, Min Operating Temperature=-40°C, Package Description="3-Pin Surface Mount Device, Body 2.6 x 2.6 mm", Package Quantity=2500, Resistance=50Ohm, Connector Type=RF&Coax, Contact Material=Brass, Contact Plating=Gold, Datasheet URL=https://www.hirose.com/product/en/download_file/key_name/U.FL/category/Catalog/doc_file_id/31697/?file_category_id=4&item_id=15&is_series=1, Datasheet Version=Aug-16, Fastening Type=Snap, Impedance=50Ohm, Manufacturer URL=https://www.hirose.com, Mounting Technology=SM, Package Reference=U.FL-R-SMT, Packaging=TapeandReel, RoHS Compliant=True
J5 J8: library part CMP-047-000040-15, "WR-WTB SMT Male Horizontal Shrouded Header, pitch 2mm, 2p", Contact Resistance=20mOhm, JLCPCB Part #=C295747, Operating Temperature="-25 to +85degC", Rated Current=2A, Withstanding Voltage=800VAC, Working Voltage=100VAC, Component Type=Standard, ComponentLink1Description=Manufacturer, ComponentLink1URL=http://www.we-online.de, ComponentLink2Description=Datasheet, ComponentLink2URL=https://www.we-online.com/catalog/datasheet/620102131822.pdf, Design Item ID=620102131822, Gender=Male, Mounting Technology=SMT, Packaging="Tape and Reel", Page Part #=K620102131822, Part number=620102131822, Pin Count=2, Pin Number=2, Pitch=2mm, Published Date="January 2020", Publisher="Wurth Elektronik", Source=WR-WTB_2.00mm.SchLib, Type=Horizontal
L1 L2: library part CMP-051-000215-6, "WE-KI SMT Wire Wound Ceramic Inductor, size 1008, 390nH, 0.47A", Case/Size Code=1008, DC Resistance Max=1.06Ohm, Inductance=390nH, Inductance Tolerance=+/-2%, Manufacturer="Wurth Elektronik", Operating Temperature Max=125°C, Operating Temperature Min=-40°C, Rated Current=0.47A, Self Resonant Frequency=530MHz, Category="RF Inductors", Component Type=Standard, ComponentLink1Description="Manufacturer Link", ComponentLink1URL=http://www.we-online.de, ComponentLink2Description=Datasheet, ComponentLink2URL=https://www.we-online.com/catalog/datasheet/744762239GA.pdf, Design Item ID=744762239GA, Height=1.6mm, Length=2.5mm, Manufacturer Part Number=744762239GA, Match Code=WE-KI, Mount=SMT, Packaging="Tape and Reel", Pin Count=2, Q Factor=45, Source=WE-KI.SchLib, Width=2mm
L3: library part CMP-051-000181-6, "WE-KI SMT Wire Wound Ceramic Inductor, size 1008, 15nH, 1A", Case/Size Code=1008, DC Resistance Max=0.08Ohm, Inductance=15nH, Inductance Tolerance=+/-2%, Manufacturer="Wurth Elektronik", Operating Temperature Max=125°C, Operating Temperature Min=-40°C, Rated Current=1A, Self Resonant Frequency=2700MHz, Category="RF Inductors", Component Type=Standard, ComponentLink1Description="Manufacturer Link", ComponentLink1URL=http://www.we-online.de, ComponentLink2Description=Datasheet, ComponentLink2URL=https://www.we-online.com/catalog/datasheet/744762115GA.pdf, Design Item ID=744762115GA, Height=1.6mm, Length=2.5mm, Manufacturer Part Number=744762115GA, Match Code=WE-KI, Mount=SMT, Packaging="Tape and Reel", Pin Count=2, Q Factor=60, Source=WE-KI.SchLib, Width=2mm
L4: library part CMP-165-000017-2, "WE-CAIR SMT Air Coil, size 4248, 47nH, 3A, 5.6mO", Case/Size Code=4248, DC Resistance Max=5.6mO, Inductance=47nH, Inductance Tolerance=5%, Manufacturer="Wurth Elektronik", Operating Temperature Max=125°C, Operating Temperature Min=-40°C, Rated Current=3A, Self Resonant Frequency=2.1GHz, Category="RF Inductors", Component Type=Standard, ComponentLink1Description="Website Link", ComponentLink1URL=https://www.we-online.com/redexpert/article/744912147?ad, ComponentLink2Description="Datasheet Link", ComponentLink2URL=https://www.we-online.com/redexpert/spec/744912147?ad, Design Item ID=744912147, Height=4.2mm, Length=4.83mm, Manufacturer Part Number=744912147, Match Code=WE-CAIR, Mount="Surface Mount", Packaging="Tape and Reel", Pin Count=2, Q Factor=100, Source=WE-CAIR.SchLib, Width=3.81mm
L5: library part CMP-051-000211-6, "WE-KI SMT Wire Wound Ceramic Inductor, size 1008, 270nH, 0.6A", Case/Size Code=1008, DC Resistance Max=0.75Ohm, Inductance=270nH, Inductance Tolerance=+/-2%, Manufacturer="Wurth Elektronik", Operating Temperature Max=125°C, Operating Temperature Min=-40°C, Rated Current=0.6A, Self Resonant Frequency=650MHz, Category="RF Inductors", Component Type=Standard, ComponentLink1Description="Manufacturer Link", ComponentLink1URL=http://www.we-online.de, ComponentLink2Description=Datasheet, ComponentLink2URL=https://www.we-online.com/catalog/datasheet/744762227GA.pdf, Design Item ID=744762227GA, Height=1.6mm, Length=2.5mm, Manufacturer Part Number=744762227GA, Match Code=WE-KI, Mount=SMT, Packaging="Tape and Reel", Pin Count=2, Q Factor=45, Source=WE-KI.SchLib, Width=2mm
L6: library part CMP-051-000201-6, "WE-KI SMT Wire Wound Ceramic Inductor, size 1008, 100nH, 1A", Case/Size Code=1008, DC Resistance Max=0.18Ohm, Inductance=100nH, Inductance Tolerance=+/-2%, Manufacturer="Wurth Elektronik", Operating Temperature Max=125°C, Operating Temperature Min=-40°C, Rated Current=1A, Self Resonant Frequency=1100MHz, Category="RF Inductors", Component Type=Standard, ComponentLink1Description="Manufacturer Link", ComponentLink1URL=http://www.we-online.de, ComponentLink2Description=Datasheet, ComponentLink2URL=https://www.we-online.com/catalog/datasheet/744762210GA.pdf, Design Item ID=744762210GA, Height=1.6mm, Length=2.5mm, Manufacturer Part Number=744762210GA, Match Code=WE-KI, Mount=SMT, Packaging="Tape and Reel", Pin Count=2, Q Factor=60, Source=WE-KI.SchLib, Width=2mm
L7: library part CMP-165-000053-4, "WE-CAIR SMT Air Coil, size 5910, 222nH, 3A, 35mO", Case/Size Code=5910, DC Resistance Max=35mO, Inductance=222nH, Inductance Tolerance=5%, Manufacturer="Wurth Elektronik", Operating Temperature Max=125°C, Operating Temperature Min=-40°C, Rated Current=3A, Self Resonant Frequency=0.73GHz, Category="RF Inductors", Component Type=Standard, ComponentLink1Description="Website Link", ComponentLink1URL=https://www.we-online.com/redexpert/article/744918222?ad, ComponentLink2Description="Datasheet Link", ComponentLink2URL=https://www.we-online.com/redexpert/spec/744918222?ad, Design Item ID=744918222, Height=5.9mm, Length=10.55mm, Manufacturer Part Number=744918222, Match Code=WE-CAIR, Mount="Surface Mount", Packaging="Tape and Reel", Pin Count=2, Q Factor=100, Source=WE-CAIR.SchLib, Width=6.35mm
L8: library part CMP-090-000004-4, "WE-SL2 SMT Common Mode Line Filter, 1000uH, 0.8A, 0.207Ohm", DC Resistance Max=0.207Ohm, Inductance=1000uH, JLCPCB Part #=C2829007, Manufacturer="Wurth Elektronik", Operating Temperature Max=125°C, Operating Temperature Min=-40°C, Rated Current=0.8A, Rated Voltage=80V, Category="Common Mode Chokes", Component Type=Standard, ComponentLink1Description="Manufacturer Link", ComponentLink1URL=https://www.we-online.com/redexpert/article/744222?ad, ComponentLink2Description=Datasheet, ComponentLink2URL=https://www.we-online.com/redexpert/spec/744222?ad, Design Item ID=744222, Height=5mm, Impedance Max=6000Ohm, Length=9.2mm, Manufacturer Part Number=744222, Match Code=WE-SL2, Mount="Surface Mount", Number of Windings=2, Packaging="Tape and Reel", Pin Count=4, Source=WE-SL2.SchLib, Width=6mm, Winding Style=bifilar
MP1 MP2 MP3 MP4: library part CMP-00028-00004-15, "Mounting hole.  Add this so that mounting holes placed in your design don't automagically disappear when you import changes from the schematic.", Pins=1
Q1 Q2 Q3: library part CMP-013-00064-1, "MMBT5179 Series 12 V CE Breakdown .05 A NPN RF Transistor - SOT-23", Case/Package=SOT-23, Clock Frequency=2GHz, Collector Base Voltage (VCBO)=20V, Collector Emitter Breakdown Voltage=12V, Collector Emitter Saturation Voltage=400mV, Continuous Collector Current=50mA, Emitter Base Voltage (VEBO)=2.5V, JLCPCB Part #=C416012, Max Operating Temperature=150°C, Max Power Dissipation=225mW, Min Operating Temperature=-55°C, Operating Frequency="2000 MHz", Package Quantity=3000, Collector Emitter Voltage (VCEO)=12V, Collector-emitter Voltage-Max=12V, Current Rating=50mA, Frequency=2GHz, Gain=15dB, Gain Bandwidth Product=2GHz, Height=0.93mm, hFE Min=25, Lead Free="Lead Free", Length=2.92mm, Max Breakdown Voltage=12V, Max Collector Current=50mA, Mounting Technology="Surface Mount", Number of Elements=1, Packaging="Tape and Reel", Pins=3, Polarity=NPN, Power Dissipation=225mW, Radiation Hardening=No, Reach SVHC Compliant=No, RoHS Compliant=Yes, Series=-, Transition Frequency=2GHz, Voltage Rating (DC)=12V, Weight=0.03g, Width=1.3mm
R1: library part CMP-009-00245-17, "Chip Resistor, Thick Film, General Purpose, 0603, 100mW, 50V, 22 kOhm, +/-1%", Case/Package=0603, JLCPCB Part #=C31850, Max Operating Temperature=155°C, Min Operating Temperature=-55°C, Power Rating=100mW, Resistor Type="Thick Film", Tolerance=1%, Voltage Rating=50V, Elements=1, Mounting Technology=SMT, Pins=2, RoHS Compliant=Yes, Usage="General Purpose"
R2: library part CMP-009-00282-10, "Res Thick Film 0603 39K Ohm 1% 0.1W(1/10W) ±100ppm/C Pad SMD T/R", Case/Package=0603, JLCPCB Part #=C23153, Max Operating Temperature=155°C, Min Operating Temperature=-55°C, Power Rating=100mW, Resistor Type="Thick Film", Temperature Coefficient=100ppm/°C, Tolerance=1%, Voltage Rating=50V, Elements=1, Features="Moisture Resistant", Lead Free="Lead Free", Mounting Technology=SMT, Pins=2, Reach SVHC Compliant=Yes, RoHS Compliant=Yes, Usage="General Purpose"
R3 R7: library part CMP-009-00257-14, "Res Thick Film 0603 2.7K Ohm 1% 0.1W(1/10W) ±100ppm/C Pad SMD Automotive T/R", Case/Package=0603, JLCPCB Part #=C13167, Max Operating Temperature=155°C, Min Operating Temperature=-55°C, Power Rating=100mW, Resistor Type="Thick Film", Temperature Coefficient=100ppm/°C, Tolerance=1%, Voltage Rating=75V, Elements=1, Features="Automotive AEC-Q200", Lead Free="Lead Free", Mounting Technology=SMT, Packaging="Tape and Reel", Pins=2, RoHS Compliant=Yes, Usage=Precision
R4 R12 R21 R25 R27: library part CMP-009-00006-26, "Chip Jumper, Thick Film, Jumper, 0603, 100mW, 1A, 0 Ohm, <50 mOhm", Case/Package=0603, Current Rating=1A, JLCPCB Part #=C21189, Max Operating Temperature=155°C, Min Operating Temperature=-55°C, Power Rating=100mW, Resistor Type="Thick Film", Tolerance="50 mOhm", Voltage Rating=75V, Elements=1, FLIR Part #=YRES0E-1, Mounting Technology=SMT, Page Part #=ROQJ0000, Pins=2, RoHS Compliant=True, Usage=Jumper
R5: library part CMP-009-00023-27, "Chip Resistor, Thick Film, General Purpose, 0603, 100mW, 50V, 100 kOhm, +/-1%", Case/Package=0603, JLCPCB Part #=C25803, Max Operating Temperature=155°C, Min Operating Temperature=-55°C, Power Rating=100mW, Resistor Type="Thick Film", Tolerance=1%, Voltage Rating=50V, Elements=1, Mounting Technology=SMT, Pins=2, RoHS Compliant=Yes, Usage="General Purpose"
R6: library part CMP-009-00206-23, "Chip Resistor, Thick Film, General Purpose, 0603, 100mW, 50V, 18 kOhm, +/-1%", Case/Package=0603, JLCPCB Part #=C25810, Max Operating Temperature=155°C, Min Operating Temperature=-55°C, Power Rating=100mW, Resistor Type="Thick Film", Tolerance=1%, Voltage Rating=50V, Elements=1, Mounting Technology=SMT, Page Part #=ROQF1802, Pins=2, RoHS Compliant=Yes, Usage="General Purpose"
R8 R13 R18 R19 R22 R24 R26: library part CMP-009-00014-29, "Chip Resistor, Thick Film, General Purpose, 0603, 100mW, 50V, 1 kOhm, +/-1%", Case/Package=0603, JLCPCB Part #=C21190, Max Operating Temperature=155°C, Min Operating Temperature=-55°C, Power Rating=100mW, Resistor Type="Thick Film", Tolerance=1%, Voltage Rating=50V, Elements=1, FLIR Part #=YRES1K-1, Mounting Technology=SMT, Page Part #=ROQF1001, Pins=2, RoHS Compliant=Yes, Usage="General Purpose"
R9: library part CMP-009-00273-13, "Chip Resistor, Thick Film, General Purpose, 0603, 100mW, 50V, 36 kOhm, +/-1%", Case/Package=0603, JLCPCB Part #=C23147, Max Operating Temperature=155°C, Min Operating Temperature=-55°C, Power Rating=100mW, Resistor Type="Thick Film", Tolerance=1%, Voltage Rating=50V, Elements=1, Mounting Technology=SMT, Pins=2, RoHS Compliant=Yes, Usage="General Purpose"
R10 R11 R28: library part CMP-009-00287-10, "Res Thick Film 0603 5.6K Ohm 1% 0.1W(1/10W) ±100ppm/C Pad SMD T/R", Case/Package=0603, JLCPCB Part #=C23189, Max Operating Temperature=155°C, Min Operating Temperature=-55°C, Power Rating=100mW, Resistor Type="Thick Film", Temperature Coefficient=100ppm/°C, Tolerance=1%, Voltage Rating=75V, Elements=1, Features="Moisture Resistant", Lead Free="Lead Free", Mounting Technology=SMT, Pins=2, RoHS Compliant=Yes, Usage="General Purpose"
R14: library part CMP-009-00178-27, "Chip Resistor, Thick Film, General Purpose, 0603, 100mW, 50V, 270 Ohm, +/-1%", Case/Package=0603, JLCPCB Part #=C22966, Max Operating Temperature=155°C, Min Operating Temperature=-55°C, Power Rating=100mW, Resistor Type="Thick Film", Tolerance=1%, Voltage Rating=50V, Elements=1, Mounting Technology=SMT, Pins=2, Usage="General Purpose"
R15 R16 R20: library part CMP-009-00400-1, "SMD Chip Resistor, 560 Ohm, ï¿½ 1%, 100 mW, 0603 [1608 Metric], Thick Film, General Purpose", Case Code (Imperial)=0603, Case Code (Metric)=1608, JLCPCB Part #=C23204, Max Operating Temperature=155°C, Max Power Dissipation=100mW, Min Operating Temperature=-55°C, Package Quantity=1, Resistance Tolerance=1%, Resistor Type="Thick Film", Temperature Coefficient=100ppm/°C, Voltage Rating=75V, Voltage Rating (AC)=50V, Case/Package=0603, Construction=Rectangular, Depth=0.8mm, Features="Moisture Resistant", Height=0.45mm, Lead Free="Lead Free", Length=1.6mm, Military Standard=Not, Number of Terminations=2, Packaging="Tape and Reel", Pins=2, Power Rating=100mW, Reach SVHC Compliant=No, RoHS Compliant=Yes, Series=RC, Technology="THICK FILM", Termination=SMD/SMT, Tolerance=1%, Voltage Rating (DC)=50V, Weight=7.1E-05oz, Width=0.8mm
R17: library part CMP-009-00007-20, "Chip Jumper, Thick Film, Jumper, 0805, 125mW, 2A, 0 Ohm, <50 mOhm", Case/Package=0805, Current Rating=2A, Max Operating Temperature=155°C, Min Operating Temperature=-55°C, Power Rating=125mW, Resistor Type="Thick Film", Tolerance="50 mOhm", Voltage Rating=150V, Elements=1, Mounting Technology=SMT, Pins=2, RoHS Compliant=True, Usage=Jumper
R23: library part CMP-009-00038-9, "Square Trimpot(R) Trimming Potentiometer, 10 KOhm, +/- 10%, 0.5 W, -55 to 125 degC, 3-Pin THD, RoHS, Tube", Case/Package=3296W, JLCPCB Part #=C34846, Max Operating Temperature=150°C, Min Operating Temperature=-55°C, Power Rating=500mW, Tolerance=10%, Voltage Rating=300V, Datasheet URL=http://www.bourns.com/docs/Product-Datasheets/3296.pdf, Datasheet Version=May-16, Elements=1, Mounting Technology=THT, Packaging=Rail/Tube, Pins=3, RoHS Compliant=True, Usage=Potentiometer
RV1: library part CMP-190-000000-2, "WE-VE femtoF ESD Suppressor, size 0603, 6VDC, 0.05pF", Capacitance=0.05pF, Case/Size Code=0603, Clamping Voltage=40V, Leakage Current=0.05µA, Manufacturer="Wurth Elektronik", Operating Temperature Max=85°C, Operating Temperature Min=-40°C, Operating Voltage (DC)=6V, Category="ESD Protection", Component Type=Standard, ComponentLink1Description="Website Link", ComponentLink1URL=https://www.we-online.com/redexpert/article/8231606A?ad, ComponentLink2Description="Datasheet Link", ComponentLink2URL=https://www.we-online.com/redexpert/spec/8231606A?ad, Design Item ID=8231606A, ESD Air Discharge Capability=15kV, ESD Contact Discharge Capability=8kV, Height=0.5mm, Length=1.6mm, Manufacturer Part Number=8231606A, Match Code="WE-VE femtoF", Mount="Surface Mount", Packaging="Tape and Reel", Pin Count=2, Source="WE-VE femtoF.SchLib", Width=0.8mm
U1: library part CMP-019-00110-1, "1.5-V to 5.5-V, 1.5-A, 0.5-µA IQ ideal diode with integrated FET 6-SC70 -40 to 105", Max Operating Temperature=105°C, Max Output current=1.5A, Min Operating Temperature=-40°C, Height=1.1mm, Length=2mm, Mounting Technology="Surface Mount", Pins=6, Series=-, Thickness=900um, Turn-Off Delay Time=2us, Turn-On Delay Time=27us, Width=1.25mm

## Via types
v1: diameter 0.6, hole 0.3, Top Layer to Bottom Layer, tented both sides, 185 vias

## Nets (pads, with @x,y where several pads share a name; then routed paths per layer and width w, separated by ;. In a path a pad name is that pad's centre, name@x,y a point inside that pad or via, vN(x,y) a via of type N, cw(c..) or ccw(c..) an arc to the next point about the centre after c; other vN are vias at no path point)
+5V: C4.2 C19.1 C20.1 C21.1 C23.2 D1.1 D3.1 D4.2 L4.2 L7.2 Q1.3 Q2.3 R1.2 R2.2 R3.2 R20.1 R21.2 U1.6 | length 4
  Top Layer w0.33: C23.2 35.825,38.325 D4.2 ; R21.2 v1(40.4,22.7)
  other v1: 36.2,17 37.5,17 39.1,17.8 38.1,18.4 39.9,18.6 16,22 14.7,22.1 13.5,22.2 21.4,22.3 22.2,22.3 23.1,22.3 31,27.1 22.6,27.3 28.8,28 30,28 33.5,28.2 32,28.5 22.7,28.9 28.8,29.3 30,29.3 31.3,29.5 22.9,30.4 28.8,30.5 32,30.5 32.4,37.8 33.2,37.8 32.4,38.6 33.2,38.6
FREQ_TUNE: FB2.2 R23.2 | length 3.8
  Top Layer w0.33: FB2.2 42.181,25.7 42.981,26.5 R23.2
GND: C3.1 C8.2 C10.2 C12.2 C13.1 C16.1 C17.2 C18.1 C19.2 C20.2 C21.2 C22.1 C23.1 J1.1 J1.2 J2.1 J2.2 J3.1 J3.2 J4.1 J4.2 J5.MP1 J5.MP2 J6.1 J6.2 J7.1 J7.2 J8.2 J8.MP1 J8.MP2 L3.1 L8.3 MP1.1 MP2.1 MP3.1 MP4.1 R4.2 R6.1 R7.1 R8.1 R9.1 R10.1 R11.1 R15.1 R16.1 R23.3 R28.1 RV1.1 U1.2 U1.5 | length 1.9
  Top Layer w0.33: R15.1@20.35,9.55 R15.1 ; C22.1 C22.1@28.525,35.7 ; 36.8,33.7 R28.1
  other v1: 4,1.75 46,1.75 2.875,2.051 5.125,2.051 44.875,2.051 47.125,2.051 2.051,2.875 5.949,2.875 44.051,2.875 47.949,2.875 1.75,4 6.25,4 43.75,4 48.25,4 2.051,5.125 5.949,5.125 44.051,5.125 47.949,5.125 37,5.2 42,5.2 2.875,5.949 5.125,5.949 44.875,5.949 47.125,5.949 4,6.25 46,6.25 37,6.8 42,6.8 26.7,7.1 26.7,8.3 25.4,8.6 17.3,9.4 18.6,9.4 27.8,9.5 25.4,9.9 33.5,10.2 8.5,10.3 28.5,10.5 18.6,10.6 13.5,10.8 34.3,11 19.3,11.6 8.5,11.8 28.5,11.8 33.5,11.8 14.5,12.6 12.3,12.7 35.3,12.8 34.3,13.5 35.3,14.5 13.5,14.6 39.2,15.1 40.3,15.6 38.1,15.7 20.5,17.8 15.1,18 16.3,18 17.5,18 27,18.3 20.5,19 26,19.2 20.5,20.2 40.6,20.8 40.6,21.6 37.5,21.9 38.5,22.5 14.8,24.1 9.7,24.3 11.1,24.3 12.4,24.3 3.7,24.5 5,24.5 6.4,24.5 13,25.3 13,26.5 14.2,26.5 3.75,31.25 5,31.25 6.25,31.25 39,31.3 40.2,31.3 41.5,31.3 3.75,32 5,32 6.25,32 24.75,34.75 25.5,34.75 24.75,35.5 25.5,35.5 33.9,36.3 34.7,36.3 35.5,36.3 36.2,36.3 37,36.3 3.75,41 5,41 6.25,41 24.2,42.4 25.8,42.4 16,42.5 18,42.5 20,42.5 27.2,42.5 28.6,42.5 30,42.5 32.5,42.5 12.1,42.9 13.1,42.9 14.1,42.9 34.5,42.9 35.5,42.9 36.5,42.9 4,43.75 46,43.75 2.875,44.051 5.125,44.051 44.875,44.051 47.125,44.051 2.051,44.875 5.949,44.875 44.051,44.875 47.949,44.875 1.75,46 6.25,46 43.75,46 48.25,46 2.051,47.125 5.949,47.125 44.051,47.125 47.949,47.125 2.875,47.949 5.125,47.949 44.875,47.949 47.125,47.949 16,48 18,48 20,48 22.5,48 24,48 25.5,48 27.6,48 30,48 32.5,48 12,48.1 13,48.1 14,48.1 34.4,48.1 35.4,48.1 36.3,48.1 4,48.25 46,48.25
NetC1_1: C1.1 C2.2 C3.2 L3.2 | length 6
  Top Layer w0.33: C1.1 25,45.5 L3.2 27.2,45.55 C2.2
NetC1_2: C1.2 L1.2 | length 1.6
  Top Layer w0.33: L1.2 C1.2
NetC2_1: C2.1 L2.1 | length 1.6
  Top Layer w0.33: C2.1 L2.1
NetC4_1: C4.1 C5.1 C6.2 L4.1 L7.1 Q3.3 R3.1 | length 16.8
  Top Layer w0.33: Q3.3 28.31,23.5 L4.1 30.15,23.335 31.665,24.85 31.665,25.39 31.975,25.7 C4.1 R3.1 C6.2 C5.1
NetC5_2: C5.2 Q1.1 Q2.1 R1.1 R6.2 | length 9.3
  Top Layer w0.33: Q2.1 Q1.1 ; C5.2 35.025,22.7 35.89,21.835 35.89,21.31 R6.2 R1.1 36.51,19.165 Q1.1@36.55,18.055
NetC6_1: C6.1 D1.2 D3.2 R5.1 | length 5
  Top Layer w0.33: D1.2 D3.2 ; C6.1 34.7,27.3 D3.2 ; R5.1 D3.2
NetC7_1: C7.1 Q1.2 R8.2 | length 3.2
  Top Layer w0.33: C7.1 36.92,13.335 36.92,15.945 Q1.2
NetC7_2: C7.2 C8.1 L5.1 | length 3.7
  Top Layer w0.33: C7.2 38.61,12.759 39.665,12.759 C8.1 39.906,12.39 39.906,11.335 L5.1
NetC9_1: C9.1 J5.2 L8.2 | length 5.3
  Top Layer w0.5: J5.2 15.75,35.5 L8.2
NetC9_2: C9.2 J5.1 L8.1 | length 5.3
  Top Layer w0.5: J5.1 15.75,37.5 L8.1
NetC10_1: C10.1 FB2.1 R5.2 | length 3.4
  Top Layer w0.33: R5.2 37.8,28.7 C10.1 FB2.1
NetC11_1: C11.1 R14.1 R25.2 | length 5
  Top Layer w0.33: C11.1 26.525,14.3 26.835,14.61 26.835,14.635 27.45,15.25 28.95,15.25 ; R25.2 29.7,14.525 28.975,15.25 28.95,15.25 ; R14.1 29.7,15.975 29.39,15.665 29.365,15.665 28.95,15.25
NetC11_2: C11.2 D2.3 R16.2 | length 4.1
  Top Layer w0.33: D2.3@24.45,11.934 D2.3 24.45,12.577 24.573,12.7 C11.2 R16.2
NetC12_1: C12.1 Q3.1 R2.1 R9.2 | length 4.7
  Top Layer w0.33: R2.1 C12.1 ; R9.2 C12.1 ; Q3.1 18.888,24.458 17.343,24.458 C12.1
NetC13_2: C13.2 FB1.2 R22.2 R26.2 | length 4.5
  Top Layer w0.33: FB1.2 C13.2
NetC14_1: C14.1 J4.3 RV1.2 | length 3.3
  Top Layer w0.33: RV1.2 10.85,14.15 10.85,15.55 C14.1 ; J4.3 RV1.2@11,14
NetC14_2: C14.2 L6.1 R17.1 | length 3
  Top Layer w0.33: C14.2 11.248,17.548 11.248,17.998 12.104,18.854 12.754,18.854 R17.1
NetC15_1: C15.1 D2.1 R15.2 | length 4.1
  Top Layer w0.33: R15.2 C15.1 22.427,12.7 22.55,12.577 D2.1 D2.1@22.55,11.934
NetC15_2: C15.2 R12.2 R27.1 | length 2.9
  Top Layer w0.33: R27.1 R12.2 C15.2
NetC16_2: C16.2 L6.2 Q3.2 R10.2 R11.2 R17.2 R27.2 | length 11.9
  Top Layer w0.33: L6.2 18.5,21.05 R10.2 ; Q3.2 18.835,22.445 18.835,21.11 R10.2 ; R27.2 19.025,17.3 19.6,17.875 19.6,19.725 18.525,20.8 R10.2
NetC17_1: C17.1 D2.5 R18.1 | length 3.8
  Top Layer w0.33: C17.1 R18.1 22.975,16.7 22.55,16.275 D2.5
NetC18_2: C18.2 D2.4 R19.1 | length 3.6
  Top Layer w0.33: D2.4 24.475,14.676 24.475,16.675 R19.1 C18.2
NetC22_2: C22.2 FB3.1 U1.1 | length 3.9
  Top Layer w0.33: FB3.1 26.8,37.15 U1.1
NetD2_2: D2.2 R13.1 R24.1 | length 3.5
  Top Layer w0.33: R24.1 22.525,10.3 23.005,10.78 23.005,10.803 23.5,10.803 ; D2.2 23.5,11.75 23.5,10.803 ; R13.1 23.975,10.3 23.665,10.61 23.665,10.638 23.5,10.803
NetD4_1: D4.1 R28.2 | length 1.4
  Top Layer w0.33: R28.2 D4.1
NetFB3_2: FB3.2 L8.4 | length 2.2
  Top Layer w0.5: L8.4 25.2,37.77 FB3.2
NetJ1_1: J1.3 L1.1 | length 1.4
  Top Layer w0.33: J1.3 L1.1
NetJ2_1: J2.3 L2.2 | length 1.4
  Top Layer w0.33: L2.2 J2.3
NetJ3_1: J3.3 L5.2 | length 1.4
  Top Layer w0.33: J3.3 L5.2
NetJ6_1: J6.3 R12.1 | length 3.1
  Top Layer w0.33: J6.3 16.088,12.613 18.913,12.613 R12.1
NetJ7_1: J7.3 R25.1 | length 2.1
  Top Layer w0.33: J7.3 31.15,12.675 31.15,14.35 R25.1
NetQ2_2: Q2.2 R7.2 R14.2 | length 3.5
  Top Layer w0.33: R14.2 31.343,16.043 32.888,16.043 Q2.2 32.749,15.945 32.749,14.835 R7.2@32.725,14.672 ; R7.2@32.39,14.628 R7.2@32.724,14.668
NetR4_1: R4.1 U1.3 | length 1.9
  Top Layer w0.33: R4.1 30.338,34.038 30.338,35.815 30.373,35.85 U1.3
NetR13_2: R13.2 R22.1 R24.2 R26.1
NetR18_2: R18.2 R19.2 R20.2 | length 2.9
  Top Layer w0.33: R20.2 R18.2 R19.2
NetR21_1: R21.1 R23.1 | length 3.6
  Top Layer w0.33: R21.1 42.66,24.3 R23.1
Q_TUNE: FB1.1 J8.1 | length 27.2
  Bottom Layer w0.5: 9.6,27.5 8.95,26.85 8.95,13.35 15,7.3 v1(19.2,7.3)
  other v1: 20,7.3 9.4,28.5 10.7,28.5 12,28.5
pads on no net: U1.4

## Polygon pours and split planes (outlines as drawn)
GND on Layer 2 "GND_L02_P000" (solid, remove dead copper, pour order 0): 0,50 0,0 50,0 50,50
+5V on Layer 3 "+5V_L03_P001" (solid, remove dead copper, pour order 1): 0,0 50,0 50,50 0,50
GND on Top Layer "GND_L01_P023" (solid, remove dead copper, pour order 23): 16.9,12.1 16.9,9.1 21,9.1 21,10.2 19.7,10.2 19.7,12.1
GND on Top Layer "GND_L01_P022" (solid, remove dead copper, pour order 22): 30,12.2 27.5,12.2 27.5,10.4 24.9,10.4 24.9,6.7 28.5,6.7 28.5,9.9 30,9.9
GND on Top Layer "GND_L01_P020" (solid, remove dead copper, pour order 20): 31.9,9.9 31.9,12.25 33.8,12.25 33.8,15.1 35.8,15.1 35.8,9.9
GND on Top Layer "GND_L01_P019" (solid, remove dead copper, pour order 19): 37.8,13.7 37.8,16 40.7,16 40.7,13.7
GND on Top Layer "GND_L01_P018" (solid, remove dead copper, pour order 18): 38.794,22.8 38.794,22 41.2,22 41.2,20.4 37.2,20.4 37.2,22.8
+5V on Top Layer "+5V_L01_P017" (solid, remove dead copper, pour order 17): 34.4,16.6 34.4,17.5 37.25,17.5 37.25,20.2 40.25,20.2 40.25,16.6
GND on Top Layer "GND_L01_P016" (solid, remove dead copper, pour order 16): 38.7,31.7 44.5,31.7 44.5,27.5 41.5,27.5 41.5,29.7 38.7,29.7
+5V on Top Layer "+5V_L01_P014" (solid, remove dead copper, pour order 14): 22.2,26.7 34,26.7 34,31 22.2,31
GND on Top Layer "GND_L01_P012" (solid, remove dead copper, pour order 12): 22.1,20.5 20.1,20.5 20.1,17.5 22.1,17.5
+5V on Top Layer "+5V_L01_P011" (solid, remove dead copper, pour order 11): 20.9,20.8 20.9,22.7 23.6,22.7 23.6,20.8
+5V on Top Layer "+5V_L01_P010" (solid, remove dead copper, pour order 10): 13,23.8 16.3,23.8 16.3,21.6 13,21.6
GND on Top Layer "GND_L01_P009" (solid, remove dead copper, pour order 9): 16.3,26.9 16.3,23.8 9,23.8 9,26.9
GND on Top Layer "GND_L01_P008" (solid, remove dead copper, pour order 8): 11.8,15 11.8,12.3 11.9,12.2 11.9,9.8 15,9.8 15,15
GND on Top Layer "GND_L01_P007" (solid, remove dead copper, pour order 7): 14.7,19.7 19,19.7 19,17.5 14.7,17.5
GND on Top Layer "GND_L01_P006" (solid, remove dead copper, pour order 6): 11.5,46.5 11.5,49 36.7,49 36.7,46.5 34,46.5 34,47.5 14.3,47.5 14.3,46.5
GND on Top Layer "NONET_L-01_P-001" (solid, remove dead copper, pour order 5): 14.5,44.5 14.5,43.4 21.9,43.4 21.9,44.2 26.5,44.2 26.5,43.1 34,43.1 34,44.5 37.5,44.5 37.5,42 11.5,42 11.5,44.5
+5V on Top Layer "+5V_L01_P004" (solid, remove dead copper, pour order 4): 32,37 37.5,37 37.5,39.1 32,39.1
GND on Top Layer "GND_L01_P003" (solid, remove dead copper, pour order 3): 22,36.8 37.5,36.8 37.5,33 22,33

## Other copper
Top Layer:
  rectangle net GND: 3.3,22.4 6.8,25.2
  rectangle net Q_TUNE: 9,27.1 12.5,29
  rectangle net Q_TUNE: 18.8,6.8 21.6,7.9
  rectangle net NetR13_2: 22,6.75 24.5,9.25
  rectangle net GND: 8,9.8 10.1,12.2
  region net GND: 42.5,7.2 40.4,7.2 40.4,4.8 42.5,4.8
  rectangle net GND: 36.5,4.8 38.6,7.2
  rectangle net NetC4_1: 25.6,20.4 31.1,24.2
  rectangle net GND: 25.5,17.8 27.3,19.6
  region net GND: 6.75,34 3.25,34 3.25,28.8 6.75,28.8
  rectangle net GND: 3.25,39 6.75,41.5
Bottom Layer:
  rectangle net Q_TUNE: 9,27 12.5,29
  rectangle net Q_TUNE: 18.8,6.8 20.5,7.9

## Silkscreen, mask and mechanical layers (free items; w line width, h text height)
Top Overlay:
  text "5VDC IN" at 0.635,39.75 h2 r270
  text "+    -" at 2.155,38.25 h2 r270
  text "CTRL IN" at 0.635,29.35 h2 r270
  text "+    -" at 2.055,28.15 h2 r270
  text "TUNE FREQ" at 47.465,22.25 h2 r90
  text "LNA IN" at 9.3,5.694 h2
  text "ATT IN" at 14.2,5.694 h2
  text "ATT OUT" at 29.275,5.634 h2
  text "LNA OUT" at 37.775,0.734 h2
Bottom Overlay:
  region: 32,47.5 32,39.5 40,39.5 40,47.5
  text "JLCJLCJLCJLC" at 30.55,39.55 h1